# Altium PCB TK_EE06.PcbDoc
Units mm, origin at the board's own origin, x right, y up, seen from the top; angles counter-clockwise.
Board outline 76.4 x 52.91 mm, 6 copper layers (L1 (Top), L2 (GND), L3 (3.3V), L4 (5V Analog), L5 (GND), L6 (Bottom)), stack 1.231 mm thick; 53 components, 48 nets, 262 pads, 127 vias.
Unrouted connection lines stored in the file: 9.
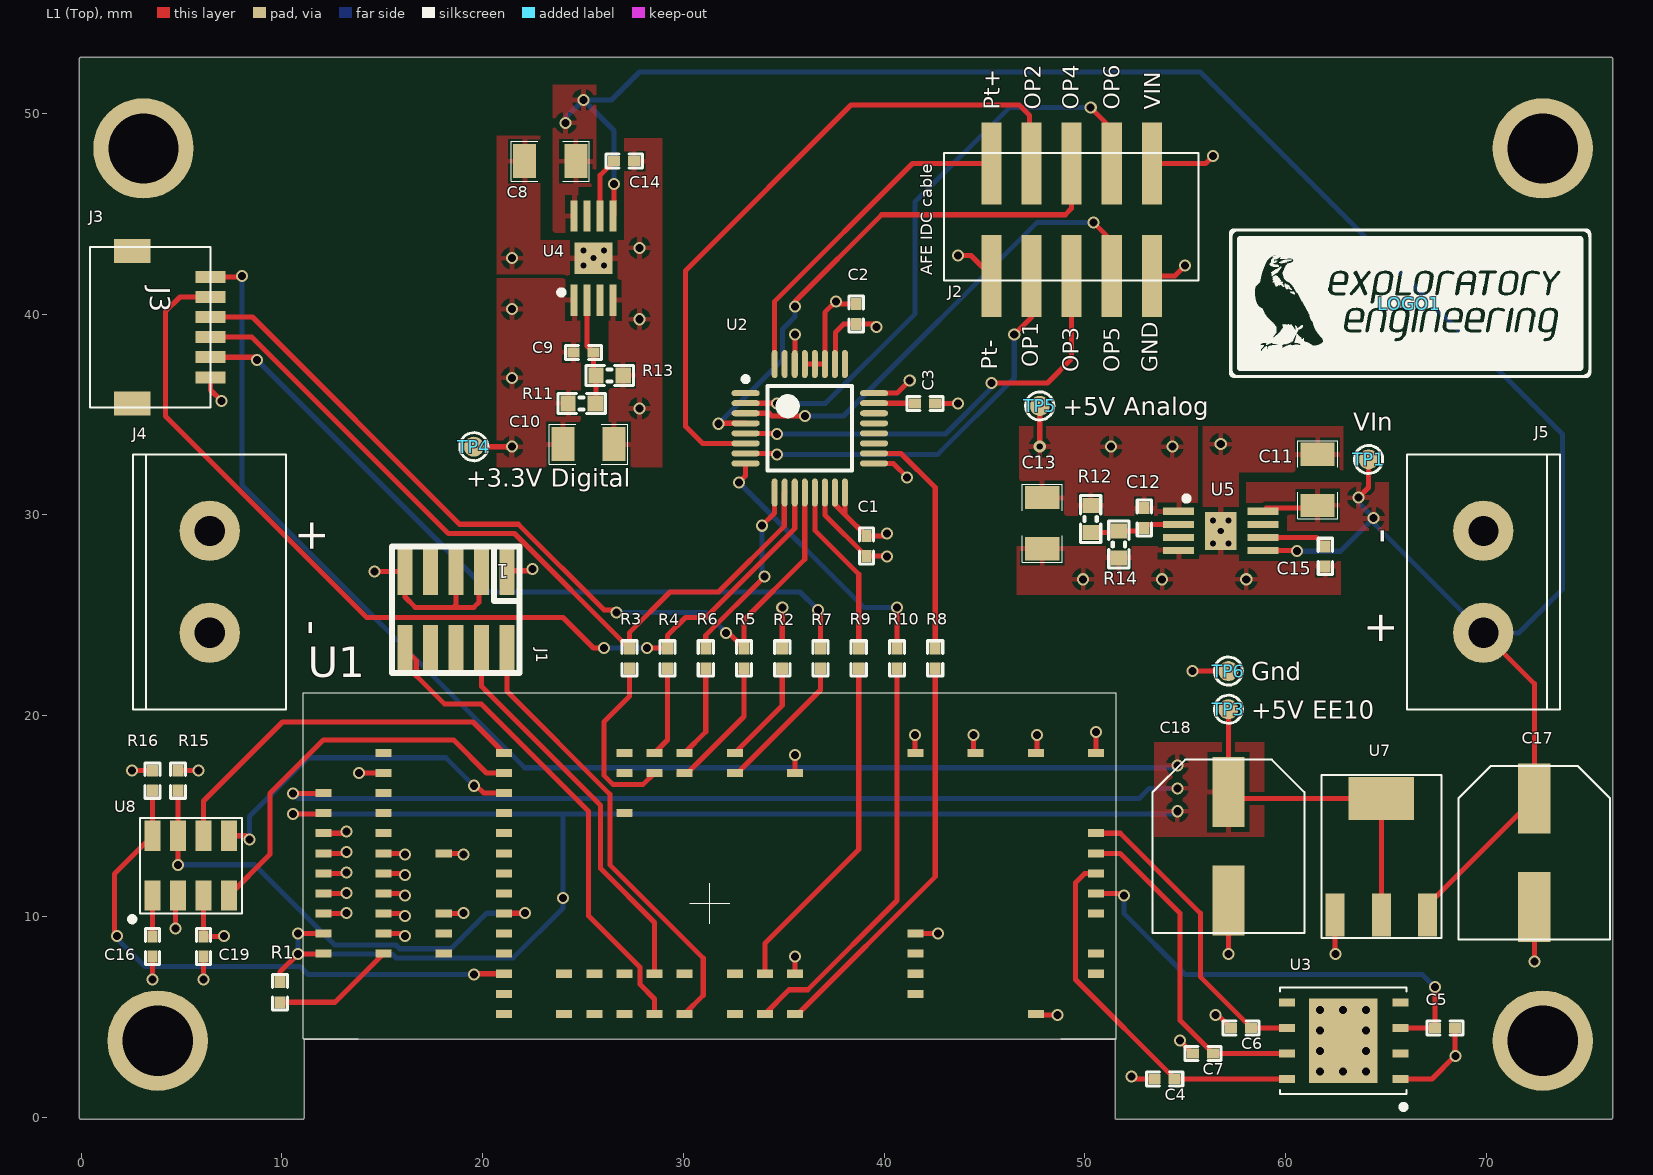
[diagram p0: L1 (Top) view]
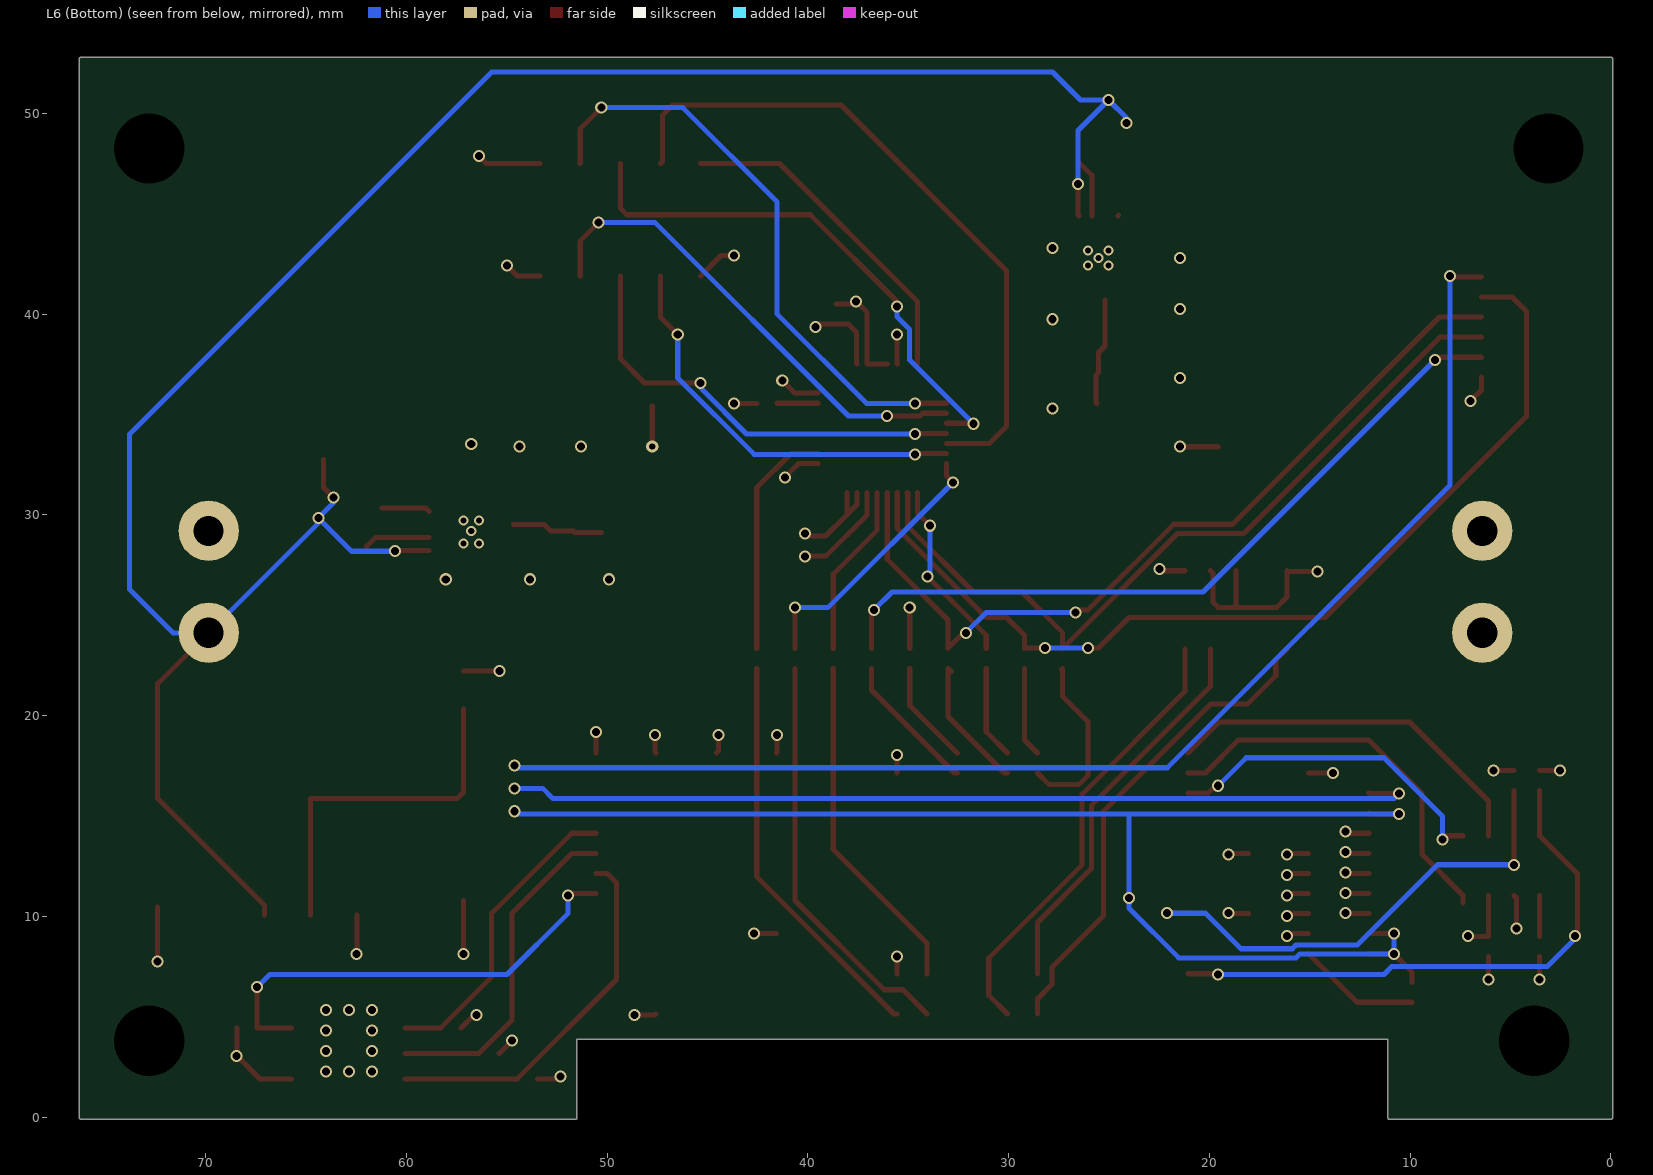
[diagram p1: L6 (Bottom) view, seen from below]
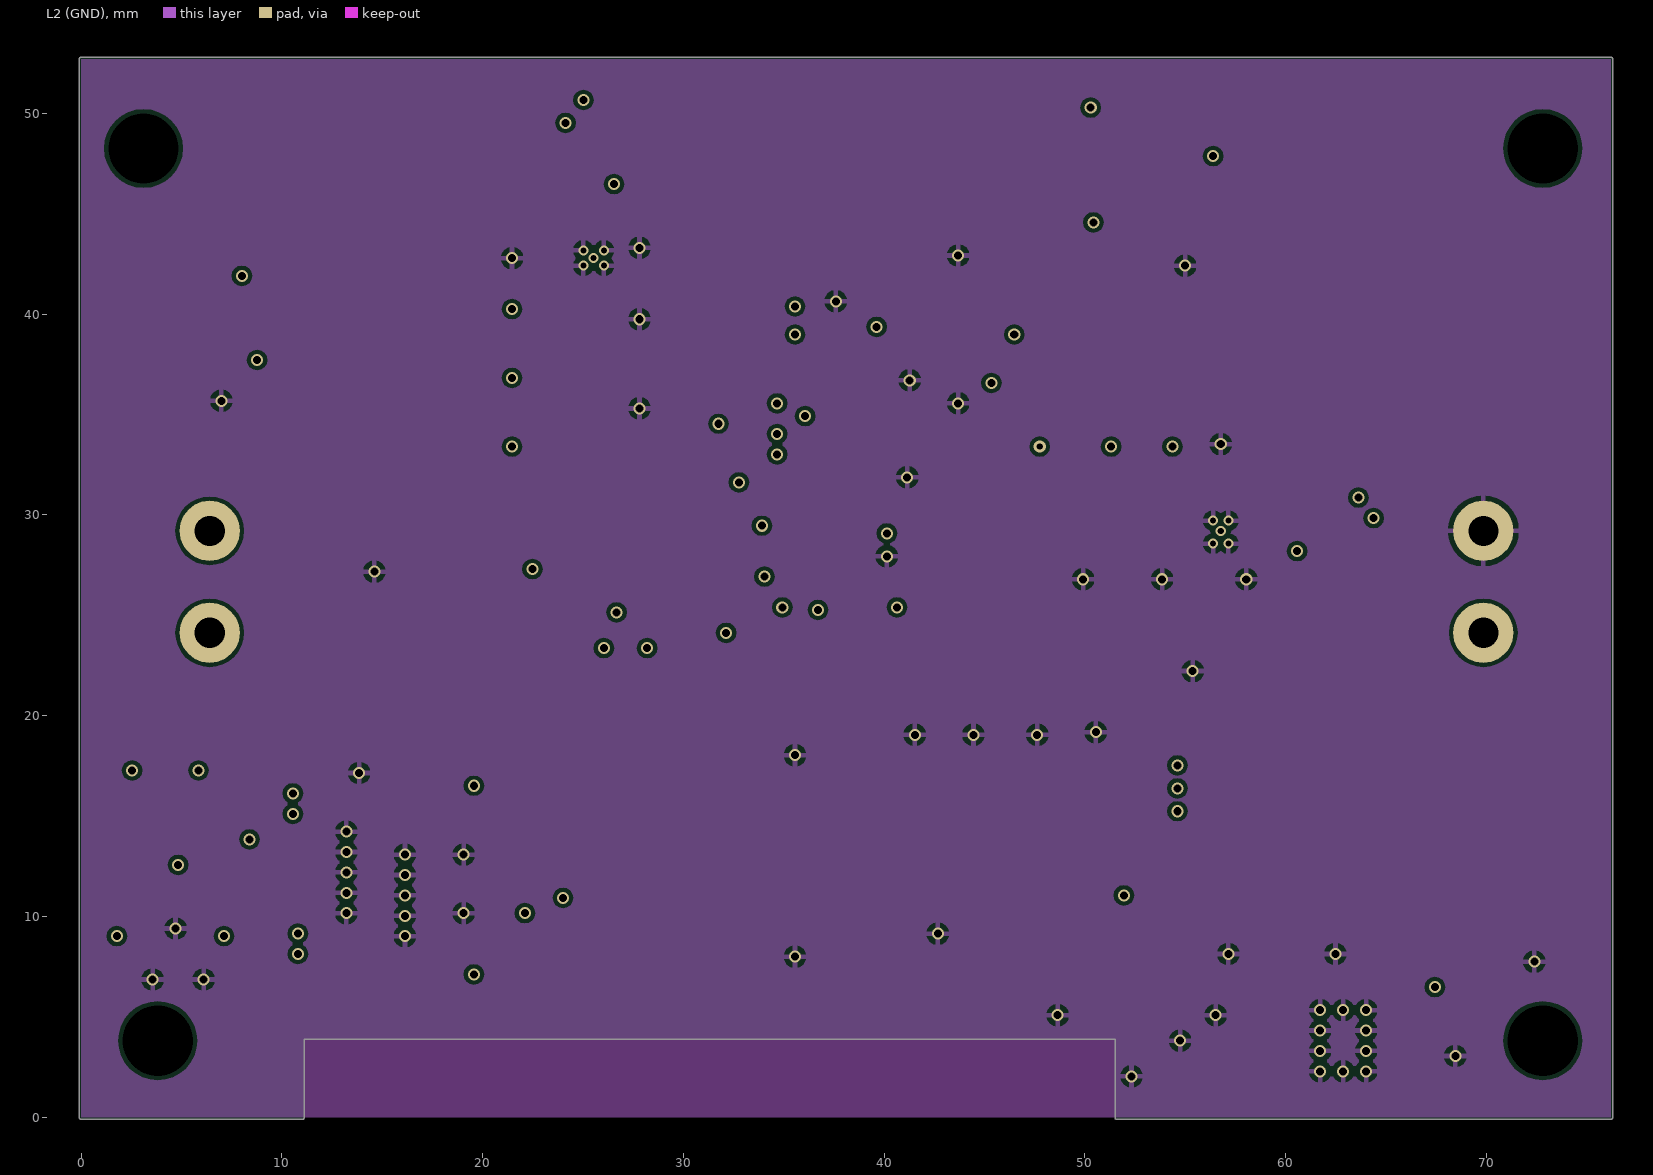
[diagram p2: L2 (GND)]
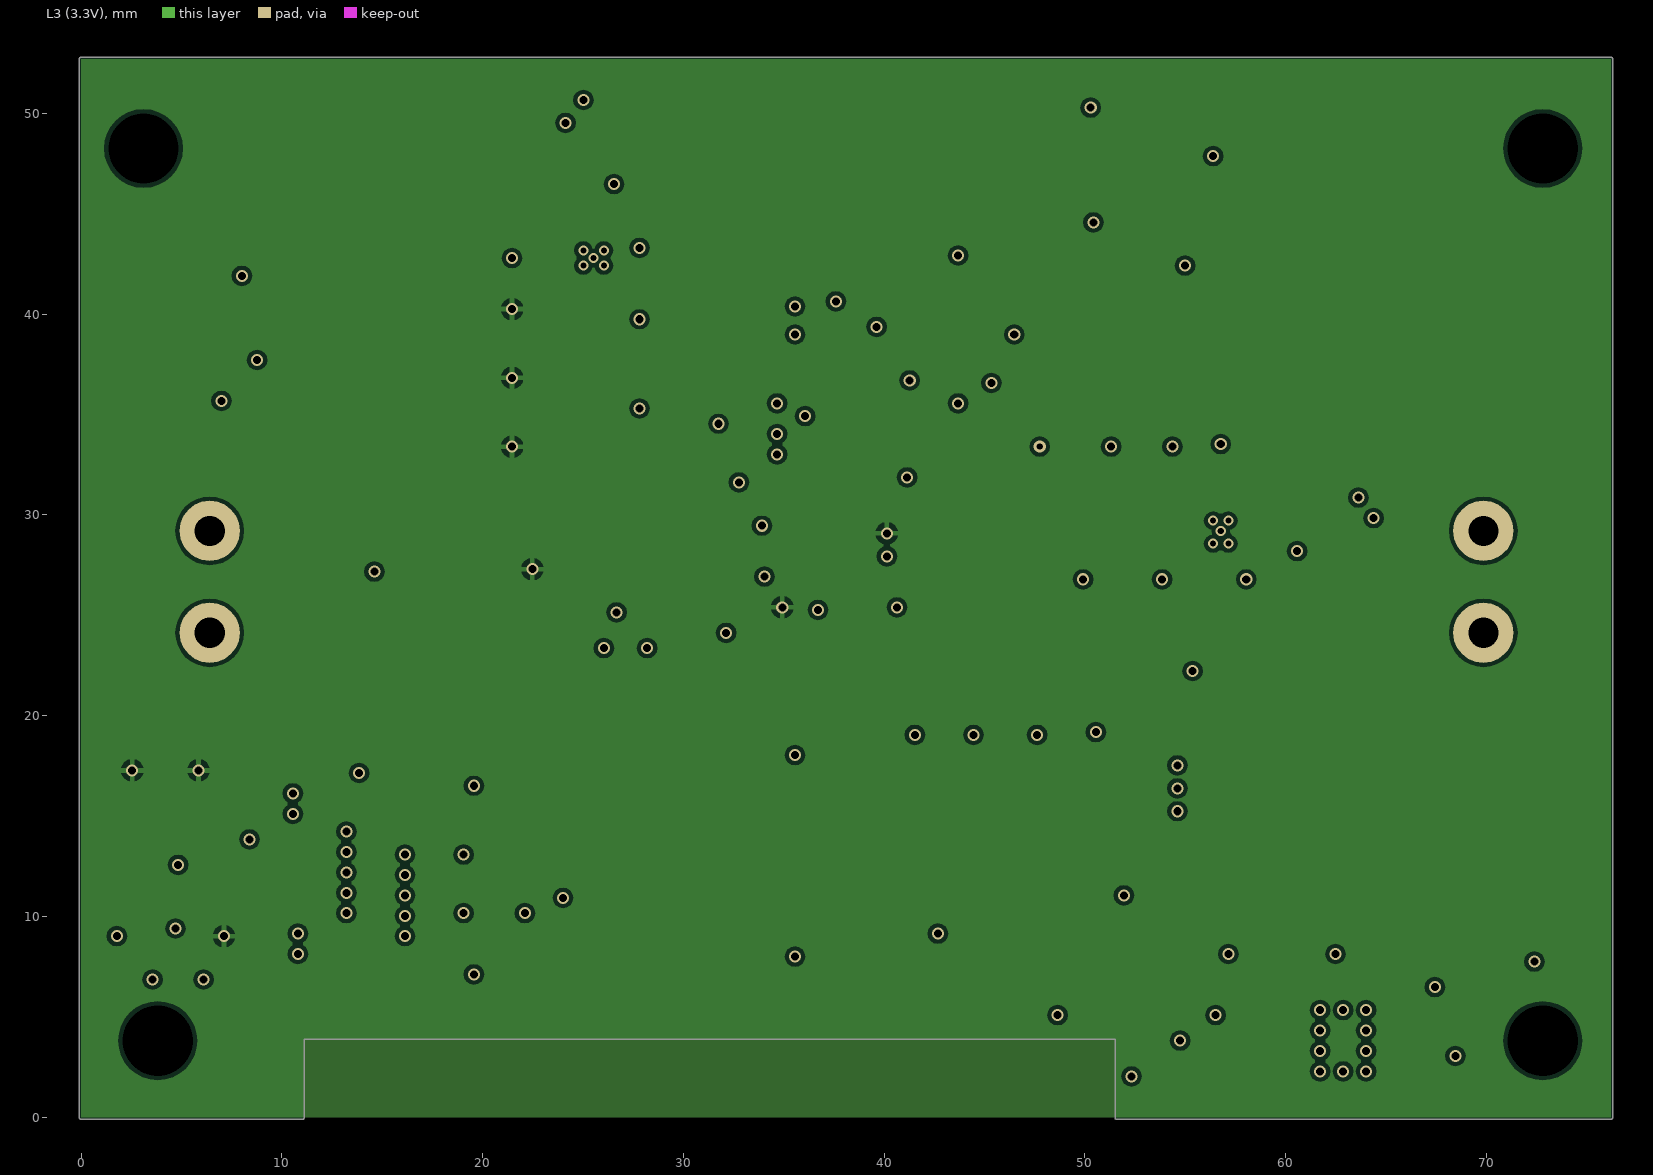
[diagram p3: L3 (3.3V)]
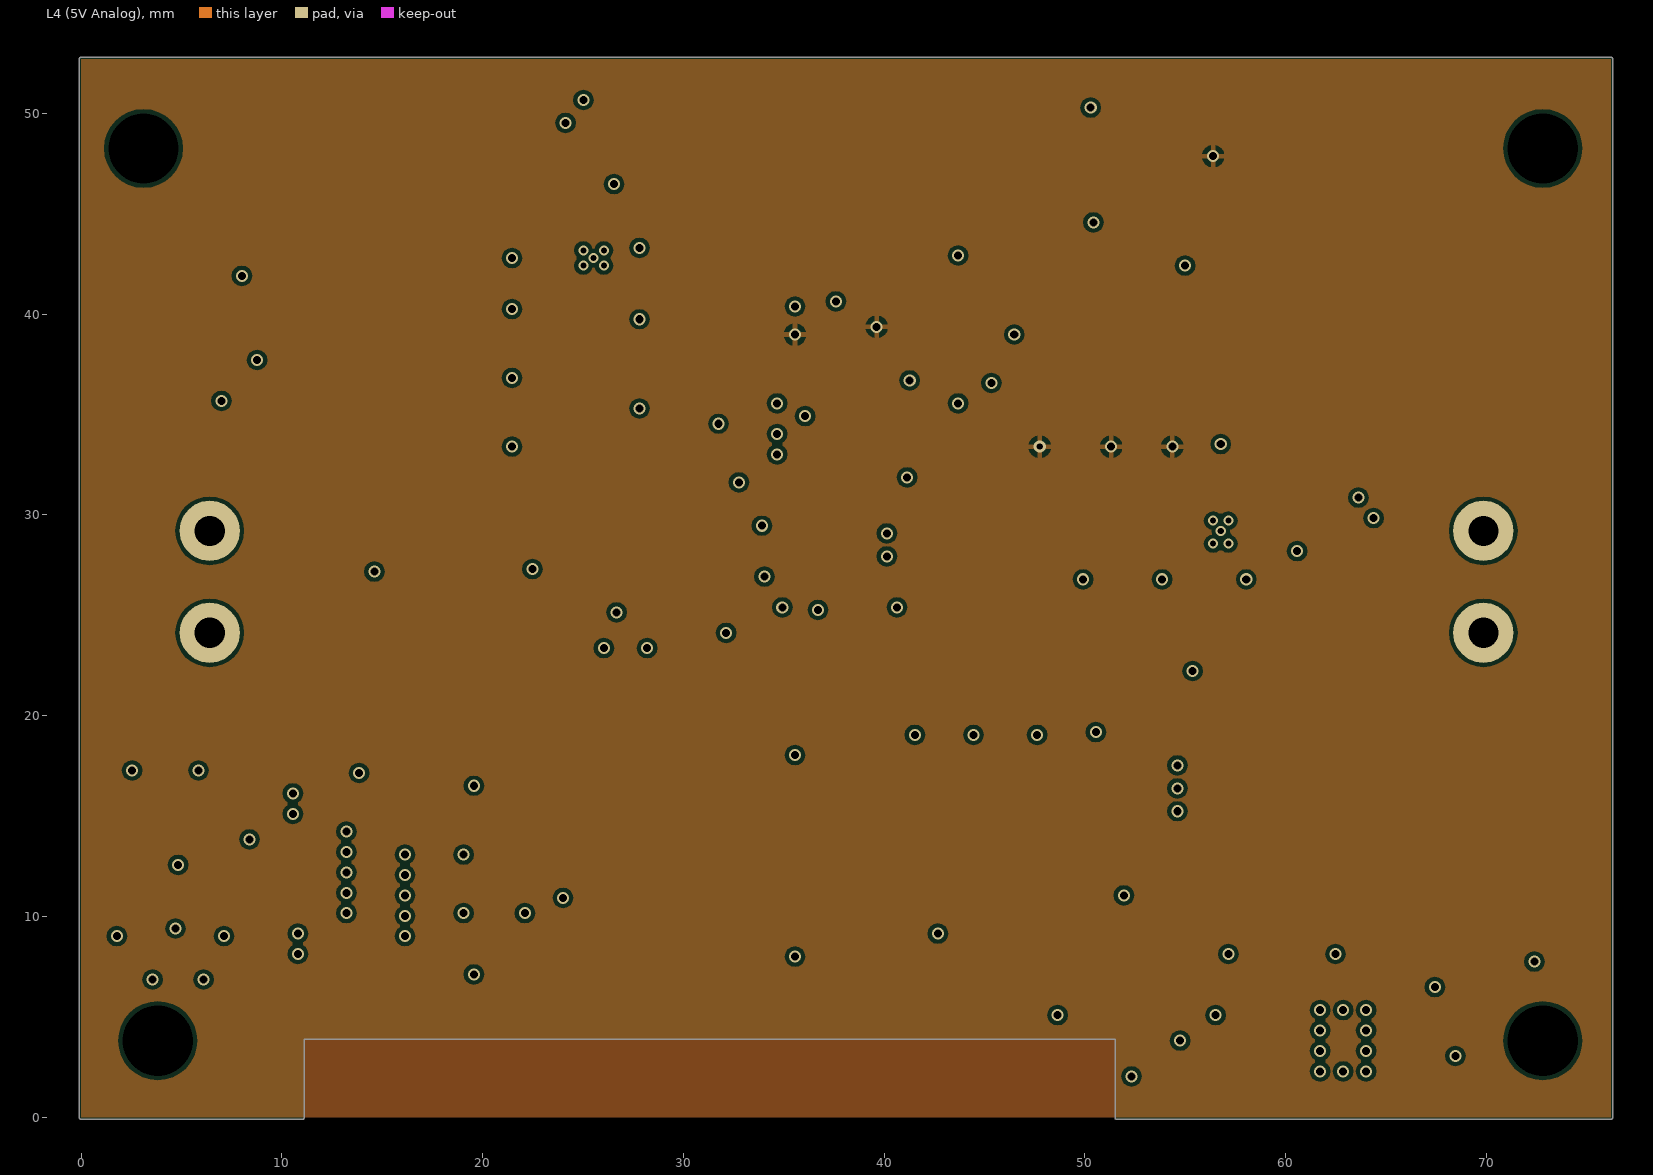
[diagram p4: L4 (5V Analog)]
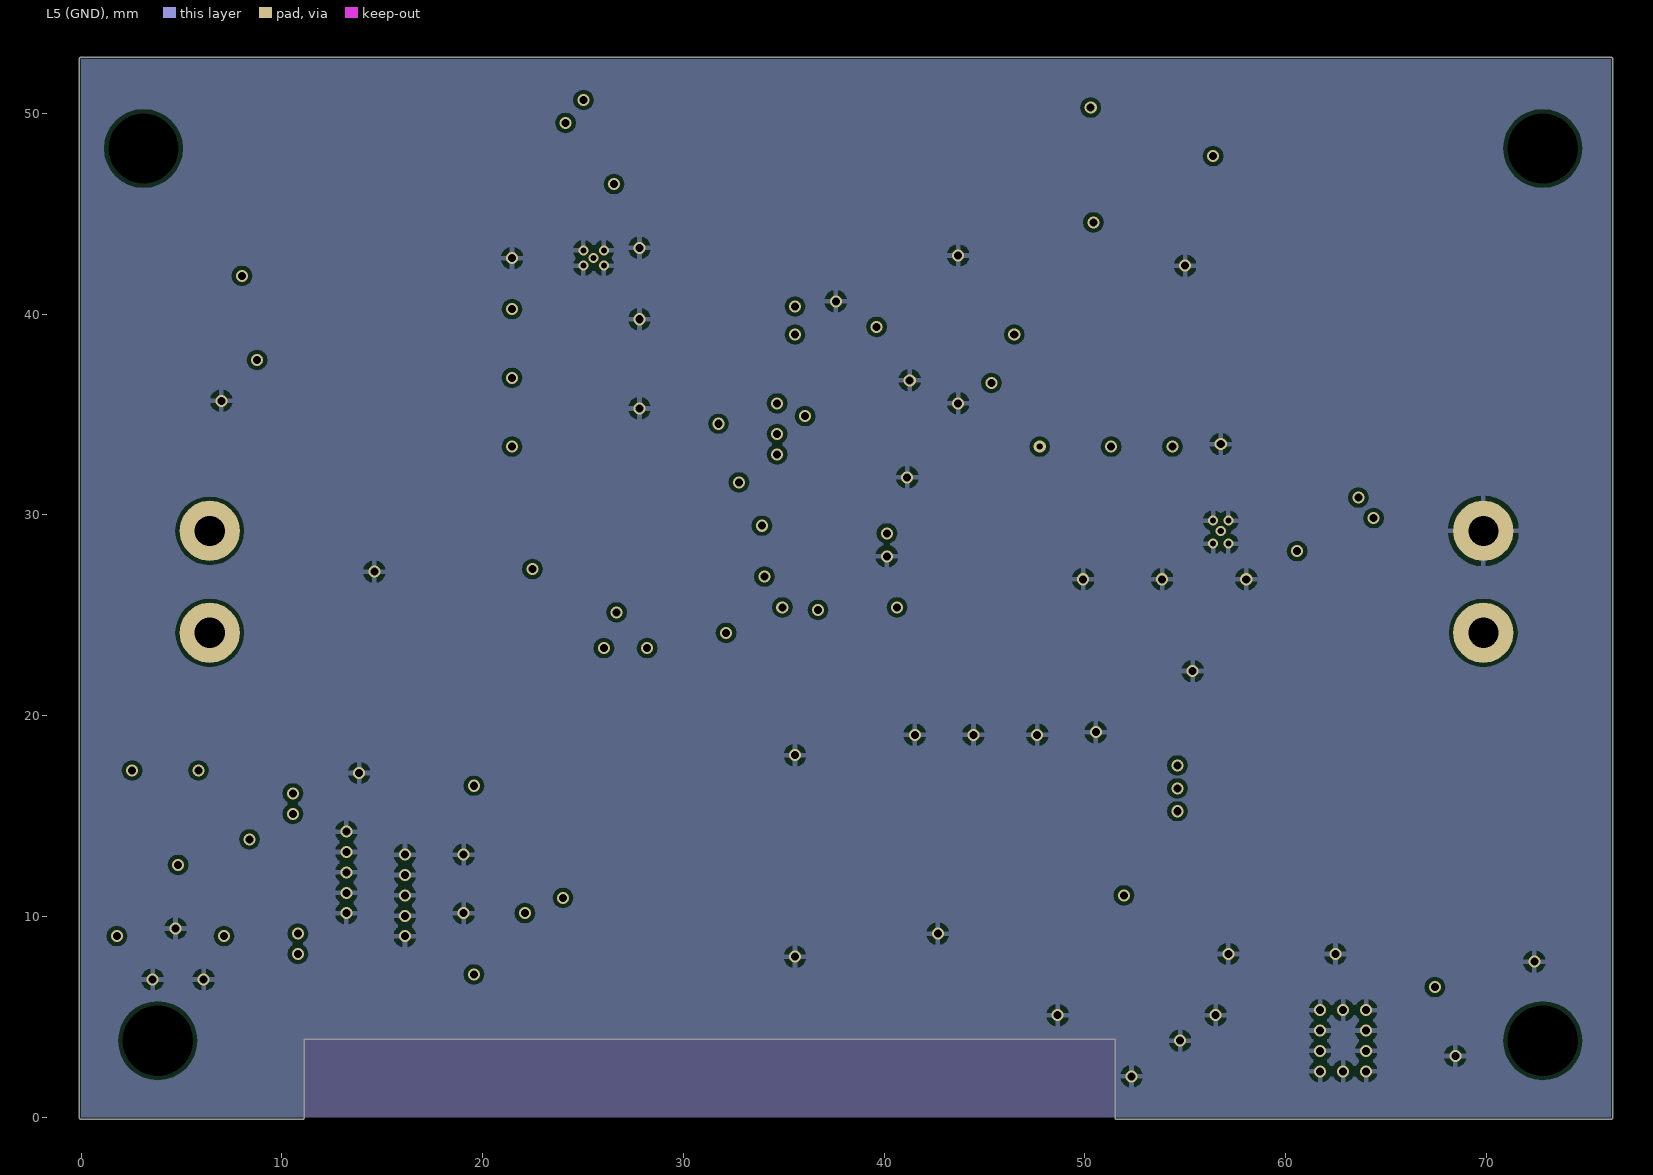
[diagram p5: L5 (GND)]
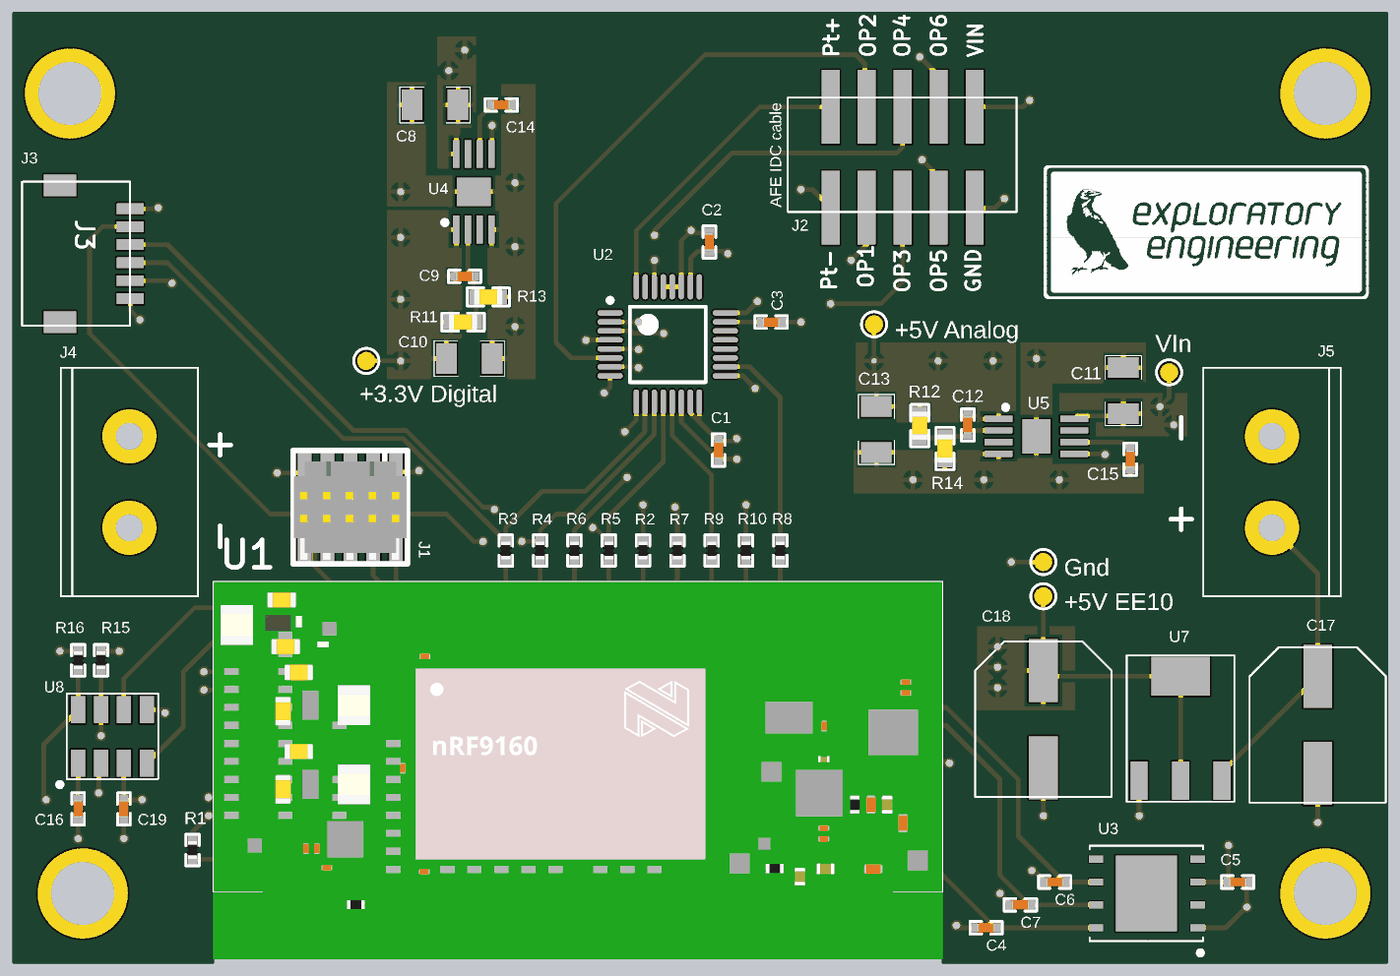
[diagram p6: 3D render of the assembled board from above, using the file's embedded part models]

## Layer stack, top to bottom
Top Solder: solder mask 0.0102, Solder Resist, Dk 3.5
L1 (Top): signal copper 0.0356
Dielectric 1: core 0.254, FR-4, Dk 4.2
L2 (GND): signal copper 0.036
Dielectric 3: prepreg 0.127, Dk 4.2
L3 (3.3V): signal copper 0.036
Dielectric 4: core 0.254, Dk 4.2
L4 (5V Analog): signal copper 0.036
Dielectric 5: prepreg 0.127, Dk 4.2
L5 (GND): signal copper 0.036
Dielectric 2: core 0.254, Dk 4.2
L6 (Bottom): signal copper 0.0356
Bottom Solder: solder mask 0.0102, Solder Resist, Dk 3.5

## Board outline
0,-0.1 cw(c0,0) -0.1,0 -0.1,52.705 cw(c0,52.705) 0,52.805 76.2,52.805 cw(c76.2,52.705) 76.3,52.705 76.3,0 cw(c76.2,0) 76.2,-0.1 51.562,-0.1 cw(c51.562,-0.05) 51.512,-0.05 51.512,3.887 11.099,3.887 11.099,-0.05 cw(c11.049,-0.05) 11.049,-0.1

## Design rules (kind name [scope] priority, off if disabled: settings)
Clearance [All] p1: gap=0.2 ignorepadtopadclearanceinfootprint=FALSE
HoleSize [All] p1: absolutevalues=TRUE maxlimit=4 minlimit=0.025 maxpercent=80.000 minpercent=20.000
MinimumSolderMaskSliver [All] p1: minsoldermaskwidth=0
PolygonConnect [All] p1: connectstyle=Relief reliefconductorwidth=0.254 reliefentries=4 polygonreliefangle="90 Angle" airgapwidth=0.254
RoutingVias [All] p1: holewidth=0.711 width=1.27 viastyle="Through Hole" minholewidth=0.711 minwidth=1.27 maxholewidth=0.711 maxwidth=1.27
SilkToSilkClearance [All] p1: silktosilkclearance=0.1
SilkToSolderMaskClearance [IsPad] p1: minsilkscreentomaskgap=0 clearancetoexposedcopper=TRUE
SolderMaskExpansion [All] p1: expansion=0.102
Width [All] p1: maxlimit=0.254 minlimit=0.254 preferedwidth=0.254
26 further rules are at their usual default settings.

## Classes and differential pairs
component class 3_Power: +3.3V_DIGITAL +5V +5V_ANALOG +12V C8 C9 C10 C11 C12 C13 C14 C15 C17 C18 D2 Gnd J4 J5 L1 R11 R12 R13 R14 TP1 TP3 TP4 TP5 TP6 U4 U5 U7 Vin
component class 2_EE-10_and_SIM_AFE_Interface: C1 C2 C3 C4 C5 C6 C7 C16 C19 J1 J2 J3 LOGO1 R1 R2 R3 R4 R5 R6 R7 R8 R9 R10 R15 R16 U1 U2 U3 U8

## Components (designator, comment, footprint, x,y, rotation, side; value= is the part's Value field where it differs from the comment)
C1 "100nF" CAPC1005X04L 39.116,28.448 r270 top
C2 "330nF" CAPC1005X04L 38.608,40.005 r90 top
C3 "1µF" CAPC1005X04L 42.037,35.56 r0 top
C4 "100nF" CAPC1005X04L 53.975,1.905 r0 top
C5 "47pF" CAPC1005X04L 67.945,4.445 r0 top
C6 "47pF" CAPC1005X04L 57.785,4.445 r180 top
C7 "47pF" CAPC1005X04L 55.88,3.175 r180 top
C8 "10uF" CAPC3216X18L 23.368,47.625 r0 top
C9 "10nF" CAPC1005X04L 25.019,38.1 r180 top
C10 "10uF" CAPC3216X18L 25.273,33.528 r0 top
C11 "10uF" CAPC3216X18L 61.595,31.75 r90 top
C12 "10nF" CAPC1005X04L 52.959,29.845 r90 top
C13 "10uF" CAPC3216X18L 47.879,29.591 r270 top
C14 "10nF" CAPC1005X04L 27.051,47.625 r180 top
C15 "10nF" CAPC1005X04L 61.976,27.94 r90 top
C16 "4.7uF" CAPC1005X04L 3.556,8.509 r90 top
C17 "100uF" INDUCTOR_UWX_100uF 72.39,15.875 r0 top
C18 "100uF" INDUCTOR_UWX_100uF 57.15,16.195 r0 top
C19 "4.7uF" CAPC1005X04L 6.096,8.509 r90 top
J1 "FTSH-105-01-F-DV-K-P" FTSH-105-K 18.669,25.273 r180 top
J2 "AFE3" AFE3_IDC_CABLE 55.67,41.68 r90 top
J3 "501568-0607" "CONN 6 PIN PICOCLASP" 6.44,41.86 r270 top
J4 "1755736" PHOENIX_CONTACT_MSTBVA_2_5 6.401,26.67 r270 top
J5 "1755736" PHOENIX_CONTACT_MSTBVA_2_5 69.85,26.67 r90 top
LOGO1 "EE LOGO" EE_LOGO 66.167,40.513 r0 top
R1 "10k" RESC1005X04L 9.906,6.223 r90 top
R2 "10k" RESC1005X04L 34.925,22.86 r90 top
R3 "47R" RESC1005X04L 27.305,22.86 r90 top
R4 "47R" RESC1005X04L 29.21,22.86 r90 top
R5 "47R" RESC1005X04L 33.02,22.86 r90 top
R6 "47R" RESC1005X04L 31.115,22.86 r90 top
R7 "47R" RESC1005X04L 36.83,22.86 r90 top
R8 "47R" RESC1005X04L 42.545,22.86 r90 top
R9 "47R" RESC1005X04L 38.735,22.86 r90 top
R10 "47R" RESC1005X04L 40.64,22.86 r90 top
R11 "178kR" RES1608x06L 28.182,35.56 r180 top
R12 "324kR" RES1608x06L 50.292,26.555 r90 top
R13 "100k" RES1608x06L 29.579,36.957 r180 top
R14 "100k" RES1608x06L 51.689,25.285 r90 top
R15 "10k" RESC1005X04L 4.826,16.764 r90 top
R16 "10k" RESC1005X04L 3.556,16.764 r90 top
TP1 "VIn" TESTPAD 64.135,32.766 r0 top
TP3 "+5V EE10" TESTPAD 57.15,20.32 r0 top
TP4 "+3.3V Digital" TESTPAD 19.558,33.401 r90 top
TP5 "+5V Analog" TESTPAD 47.752,35.433 r0 top
TP6 "Gnd" TESTPAD 57.15,22.225 r0 top
U1 "EE-10-v0.3" EE-10_V0.3 31.31,10.645 r0 top
U2 "ADS124S08" PQFP-G32 36.297,34.318 r0 top
U3 "SkySIM Argo 512 M2M SMD" QFN127P500X600X90_HS-9N 62.871,3.81 r90 top
U4 "TPS7A4901DGNR" R_PDSO_G8 24.552,44.899 r0 top
U5 "TPS7A4901DGNR" R_PDSO_G8 58.869,30.185 r270 top
U7 "LM1117MP-5/NOPB" SOT_223_LM1117 64.77,15.875 r0 top
U8 "CHIPCAP2" SENSOR_CHIPCAP2 3.556,11.049 r90 top

## Footprints (in the part's own frame and the unit in brackets; to place one, negate y for a bottom-side part, rotate by r counter-clockwise, add the part's x,y. Pads: shape width x height; smd on the part's side, far side on the other; paste and mask are expansions set on the pad)
AFE3_IDC_CABLE [mm]
  rect 4.1x1 smd: 1(5.83,10.33) 2(5.83,8.33) 3(5.83,6.33) 4(5.83,4.33) 5(5.83,2.33) 6(0.23,2.33) 7(0.23,4.33) 8(0.23,6.33) 9(0.23,8.33) 10(0.23,10.33)
  silkscreen extent 0,0 6.35,12.7
CAPC1005X04L [mm]
  rect 0.6x0.5 smd: 1(-0.5,0) 2(0.5,0)
  silkscreen extent -0.9,-0.35 0.9,0.35, body extent -0.51,-0.25 0.51,0.25, height 0.5
CAPC3216X18L [mm] "Chip Capacitor, 2-Leads, Body 3,20x1,60mm, IPC High Density"
  rect 1.15x1.7 smd: 1(-1.275,0) 2(1.275,0)
  silkscreen extent -1.95,-1 1.95,1, body extent -1.7,-0.9 1.7,0.9, height 1.8
"CONN 6 PIN PICOCLASP" [mm]
  rect 0.6x1.5 smd: 1(0,0) 2(1,0) 3(2,0) 4(3,0) 5(4,0) 6(5,0)
  rect 1.2x1.8 smd: 7(-1.3,-3.9) 7(6.3,-3.9)
  silkscreen extent -1.5,-6 6.5,0
EE-10_V0.3 [mm] "EE-10 v0.3 Footprint"
  rect 0.8x0.4 smd mask+0.05: 1(-19.25,5.5) 2(-19.25,4.5) 3(-19.25,3.5) 4(-19.25,2.5) 5(-19.25,1.5) 6(-19.25,0.5) 7(-19.25,-0.5) 8(-19.25,-1.5) 9(-19.25,-2.5) 10(-16.25,7.5) 11(-16.25,6.5) 12(-16.25,5.5) 13(-16.25,4.5) 14(-16.25,3.5) 15(-16.25,2.5) 16(-16.25,1.5) 17(-16.25,0.5) 18(-16.25,-0.5) 19(-16.25,-1.5) 20(-16.25,-2.5) 21(-13.25,2.5) 22(-13.25,-0.5) 23(-13.25,-1.5) 24(-13.25,-2.5) 25(-10.25,7.5) 26(-10.25,6.5) 27(-10.25,5.5) 28(-10.25,4.5) 29(-10.25,3.5) 30(-10.25,2.5) 31(-10.25,1.5) 32(-10.25,0.5) 33(-10.25,-0.5) 34(-10.25,-1.5) 35(-10.25,-2.5) 36(-10.25,-3.5) 37(-10.25,-4.5) 38(-10.25,-5.5) 39(-7.25,-3.5) 40(-7.25,-5.5) 41(-5.75,-3.5) 42(-5.75,-5.5) 43(-4.25,7.5) 44(-4.25,6.5) 45(-4.25,4.5) 46(-4.25,-3.5) 47(-4.25,-5.5) 48(-2.75,7.5) 49(-2.75,6.5) 50(-2.75,-3.5) 51(-2.75,-5.5) 52(-1.25,7.5) 53(-1.25,6.5) 54(-1.25,-3.5) 55(-1.25,-5.5) 56(1.25,7.5) 57(1.25,6.5) 58(1.25,-3.5) 59(1.25,-5.5) 60(2.75,-3.5) 61(2.75,-5.5) 62(4.25,6.5) 63(4.25,-3.5) 64(4.25,-5.5) 65(10.25,7.5) 66(10.25,-1.5) 67(10.25,-2.5) 68(10.25,-3.5) 69(10.25,-4.5) 70(13.25,7.5) 71(16.25,7.5) 72(16.25,-5.5) 73(19.25,7.5) 74(19.25,3.5) 75(19.25,2.5) 76(19.25,1.5) 77(19.25,0.5) 78(19.25,-0.5) 79(19.25,-2.5) 80(19.25,-3.5)
  silkscreen extent -20.25,-6.75 20.25,10.5, body extent -20.25,-10.5 20.25,10.5, height 1.2
EE_LOGO [mm] "Exploratory Engineering Logo"
  silkscreen extent -8.98,-3.65 9.05,3.74
FTSH-105-K [mm]
  rect 0.76x2.4 smd: 1(-2.54,-1.95) 2(-2.54,1.95) 3(-1.27,-1.95) 4(-1.27,1.95) 5(0,-1.95) 6(0,1.95) 7(1.27,-1.95) 8(1.27,1.95) 9(2.54,-1.95) 10(2.54,1.95)
  silkscreen extent -3.18,-3.15 3.18,3.15, body extent -3.14,-2.92 3.14,2.92, height 5.71
INDUCTOR_UWX_100uF [mm]
  rect 1.6x3.5 smd: +(0,0) -(0,-5.4)
  silkscreen extent -3.78,-7.02 3.78,1.62
PHOENIX_CONTACT_MSTBVA_2_5 [mm]
  round 3 hole 1.5: 1(-2.54,0) 2(2.54,0)
  silkscreen extent -6.35,-3.81 6.35,3.81
PQFP-G32 [mm]
  oval 1.4x0.3 smd: 1(-3.2,1.75) 2(-3.2,1.25) 3(-3.2,0.75) 4(-3.2,0.25) 5(-3.2,-0.25) 6(-3.2,-0.75) 7(-3.2,-1.25) 8(-3.2,-1.75) 17(3.2,-1.75) 18(3.2,-1.25) 19(3.2,-0.75) 20(3.2,-0.25) 21(3.2,0.25) 22(3.2,0.75) 23(3.2,1.25) 24(3.2,1.75)
  oval 0.3x1.4 smd: 9(-1.75,-3.2) 10(-1.25,-3.2) 11(-0.75,-3.2) 12(-0.25,-3.2) 13(0.25,-3.2) 14(0.75,-3.2) 15(1.25,-3.2) 16(1.75,-3.2) 25(1.75,3.2) 26(1.25,3.2) 27(0.75,3.2) 28(0.25,3.2) 29(-0.25,3.2) 30(-0.75,3.2) 31(-1.25,3.2) 32(-1.75,3.2)
  silkscreen extent -3.32,-2.1 2.1,2.57, body extent -2.5,-2.5 2.5,2.5, height 1.05
QFN127P500X600X90_HS-9N [mm] "QFN, 8-Leads, Body 5,00x6,00mm, Pitch 1,27mm, Thermal Pad 4,20x3,40mm, IPC Medium Density"
  rect 0.4x0.8 smd mask+0.05: 1(-1.905,-2.85) 2(-0.635,-2.85) 3(0.635,-2.85) 4(1.905,-2.85) 5(1.905,2.8) 6(0.635,2.8) 7(-0.635,2.8) 8(-1.905,2.8)
  rect 4.2x3.4 smd: 9(0,0)
  silkscreen extent -3.42,-3.15 2.65,3.15, body extent -2.5,-3 2.5,3, height 0.9
R_PDSO_G8 [mm]
  rect 0.35x1.55 smd: 1(0,-4.2) 2(0.65,-4.2) 3(1.3,-4.2) 4(1.95,-4.2) 5(1.95,0) 6(1.3,0) 7(0.65,0) 8(0,0)
  rect 1.89x1.57 smd: 9(0.975,-2.1)
  silkscreen extent -0.76,-3.94 -0.51,-3.68
RES1608x06L [mm]
  rect 0.75x0.8 smd: 1(2.575,0) 2(3.925,0)
  silkscreen extent 2.08,-0.5 4.43,0.5, body extent 2.45,-0.43 4.05,0.43, height 0.8
RESC1005X04L [mm]
  rect 0.6x0.55 smd: 1(-0.5,0) 2(0.5,0)
  silkscreen extent -0.87,-0.38 0.88,0.38, body extent -0.5,-0.25 0.5,0.25, height 0.3
SENSOR_CHIPCAP2 [mm]
  rect 1.5x0.8 smd: 1(0,0) 2(0,-1.27) 3(0,-2.54) 4(0,-3.81) 5(2.97,-3.81) 6(2.97,-2.54) 7(2.97,-1.27) 8(2.97,0)
  silkscreen extent -1.31,-4.44 3.86,1.14
SOT_223_LM1117 [mm]
  rect 0.95x2.15 smd: GND(-2.3,-5.8) VIN(2.3,-5.8) VOUT(0,-5.8)
  rect 3.25x2.15 smd: VOUT_TAB(0,0)
  silkscreen extent -2.99,-6.96 2.99,1.16
TESTPAD [mm]
  round 1 smd paste-5: 1(0,0)
  silkscreen extent -0.7,-0.7 0.7,0.7

## Part data
C1 C4: library part GRM155R71C104KA88D, "CAP CER 100nF 16V X7R 0402", Manufacturer="Murata Electronics North America", Operating Temperature="-55°C ~ 125°C", Package / Case="0402 (1005 Metric)", Ratings=-, Supplier Part Number 1=490-3261-6-ND, Temperature Coefficient=X7R, Tolerance=±10%, Voltage - Rated=16V, Applications="General Purpose", Capacitance=100nF, Category=Capacitors, ComponentLink1Description=http://www.murata.com/~/media/webrenewal/support/library/catalog/products/capacitor/mlcc/c02e.pdf, ComponentLink1URL=http://www.murata.com/~/media/webrenewal/support/library/catalog/products/capacitor/mlcc/c02e.pdf, Features=-, Height - Seated (Max)=-, Lead Spacing=-, Lead Style=-, Manufacturer Part Number=GRM155R71C104KA88D, Mounting Type="Surface Mount, MLCC", Packaging=Digi-Reel®, Pricing 1="1=0.16, 10=0.023, 50=0.0126, 100=0.0107, 250=0.00872, 500=0.00746, 1000=0.00581, 5000=0.00485 (EUR)", RoHS="RoHS Compliant", Size / Dimension="0.039\" L x 0.020\" W (1.00mm x 0.50mm)", Stock 1=24649903, Supplier 1=Digi-Key, Thickness (Max)="0.022\" (0.55mm)"
C2: library part CC0402KRX5R6BB334, "CAP CER 0.33UF 10V X5R 0402", Case/Package=0402, Case Code (Metric)=1005, Dielectric=X5R, Manufacturer=Yageo, Max Operating Temperature=85°C, Min Operating Temperature=-55°C, Package Quantity=10000, Tolerance=10%, Voltage Rating=10V, Capacitance=330nF, Case Code (Imperial)=0402, ComponentLink1Description=http://www.mouser.com/ds/2/447/Yageo_UPY-GP_NP0_16V-to-50V_9-358835.pdf?src-supplier=Mouser, ComponentLink1URL=http://www.mouser.com/ds/2/447/Yageo_UPY-GP_NP0_16V-to-50V_9-358835.pdf?src-supplier=Mouser, ComponentLink2Description=http://www.yageo.com/exep/pages/download/literatures/ProductSelectionGuide%202014_Final_2.pdf?src-supplier=Digi-Key, ComponentLink2URL=http://www.yageo.com/exep/pages/download/literatures/ProductSelectionGuide%202014_Final_2.pdf?src-supplier=Digi-Key, ComponentLink3Description=http://www.yageo.com/documents/recent/UPY-GPHC_X5R_4V-to-50V_25.pdf?src-supplier=Digi-Key, ComponentLink3URL=http://www.yageo.com/documents/recent/UPY-GPHC_X5R_4V-to-50V_25.pdf?src-supplier=Digi-Key, Composition=Ceramic, Halogen Free="Halogen Free", Lead Free="Lead Free", Length=0.039inch, Manufacturer Part Number=CC0402KRX5R6BB334, Mount="Surface Mount", Packaging="Tape and Reel", Pricing 1="1=0.11, 10=0.082, 100=0.0364, 500=0.02598, 1000=0.02041, 2500=0.01855, 5000=0.01707 (USD)", Stock 1=18753, Supplier 1=Digi-Key, Termination=SMD/SMT, Thickness=0.022inch, Voltage Rating (DC)=10V, Weight=2.3E-05oz, Width=0.02inch
C3: library part GRM155R70J105KA12D, "CAP CER 1UF 6.3V X7R 0402", Manufacturer="Murata Electronics North America", Operating Temperature="-55°C ~ 125°C", Package / Case="0402 (1005 Metric)", Ratings=-, Supplier Part Number 1=490-10024-6-ND, Temperature Coefficient=X7R, Tolerance=±10%, Voltage - Rated=6.3V, Applications="General Purpose", Capacitance=1µF, Category=Capacitors, ComponentLink1Description=http://www.murata.com/~/media/webrenewal/support/library/catalog/products/capacitor/mlcc/c02e.pdf, ComponentLink1URL=http://www.murata.com/~/media/webrenewal/support/library/catalog/products/capacitor/mlcc/c02e.pdf, Features="Derating Recommended", Height - Seated (Max)=-, Lead Spacing=-, Lead Style=-, Manufacturer Part Number=GRM155R70J105KA12D, Mounting Type="Surface Mount, MLCC", Packaging=Digi-Reel®, Part Status=Active, Pricing 1="1=0.1, 10=0.072, 50=0.039, 100=0.033, 250=0.027, 500=0.0231, 1000=0.018, 5000=0.015 (USD)", RoHS="RoHS Compliant", Size / Dimension="0.039\" L x 0.020\" W (1.00mm x 0.50mm)", Stock 1=3321, Supplier 1=Digi-Key, Thickness (Max)="0.022\" (0.55mm)"
C5 C6 C7: library part GRM1555C1H470FA01D, "Multilayer Ceramic Capacitors MLCC - SMD/SMT 0402 47pF 50volts C0G 1%"
C8 C10 C11 C13: library part CL31B106KAHNNNE, "CAP CER 10UF 25V X7R 1206", Case/Package=1206, Case Code (Metric)=3216, Dielectric=X7R, Manufacturer=Samsung, Max Operating Temperature=125°C, Min Operating Temperature=-55°C, Package Quantity=1, Supplier Part Number 1=1276-1804-1-ND, Tolerance=10%, Voltage=25V, Capacitance=10uF, Case Code (Imperial)=1206, ComponentLink1Description=https://datasheet.ciiva.com/26838/getdatasheetpartid-356415-26838914.pdf?src-supplier=Verical, ComponentLink1URL=https://datasheet.ciiva.com/26838/getdatasheetpartid-356415-26838914.pdf?src-supplier=Verical, ComponentLink2Description=https://datasheet.ciiva.com/25795/cl31b106kahnnne-25795260.pdf?src-supplier=Digi-Key, ComponentLink2URL=https://datasheet.ciiva.com/25795/cl31b106kahnnne-25795260.pdf?src-supplier=Digi-Key, ComponentLink3Description=https://datasheet.ciiva.com/16498/cl03a105mq3csnc-16498474.pdf?src-supplier=Future+Electronics, ComponentLink3URL=https://datasheet.ciiva.com/16498/cl03a105mq3csnc-16498474.pdf?src-supplier=Future+Electronics, Depth=1.6mm, Height=1.6mm, Length=3.2mm, Manufacturer Part Number=CL31B106KAHNNNE, Mount="Surface Mount", Packaging="Tape and Reel", Pricing 1="1 = 0,27000, 10 = 0,18700, 100 = 0,09470, 500 = 0,06476, 1000 = 0,05729 (USD)", Pricing 2="1 = 0,27000, 10 = 0,18700, 100 = 0,09470, 500 = 0,06476, 1000 = 0,05729 (USD)", Pricing 3="2000 = 0,04765, 4000 = 0,04332 (USD)", Pricing 4="2000 = 0,02720, 4000 = 0,02290, 10000 = 0,02250, 20000 = 0,02220, 50000 = 0,02180 (USD)", Radiation Hardening=No, RoHS=Yes, Stock 1=1878518, Stock 2=1878518, Stock 3=1874000, Stock 4=7124000, Supplier 1=Digi-Key, Supplier 2=Digi-Key, Supplier 3=Digi-Key, Supplier 4="Future Electronics", Supplier Part Number 2=1276-1804-6-ND, Supplier Part Number 3=1276-1804-2-ND, Supplier Part Number 4=CL31B106KAHNNNE-REEL, Thickness=0.071inch, Voltage Rating=25V, Width=0.063inch
C9 C12 C14 C15: library part CC0402KRX7R7BB103, "CAP CER 10nF 16V X7R 0402", Case/Package=0402, Case Code (Metric)=1005, Manufacturer=Yageo, Max Operating Temperature=155°C, Max Power Dissipation=100mW, Min Operating Temperature=-55°C, Operating Temperature="-55°C ~ 125°C", Package / Case="0402 (1005 Metric)", Package Quantity=10000, Ratings=-, Resistance=510kR, Supplier Part Number 1=311-1042-6-ND, Temperature Coefficient=X7R, Tolerance=±10%, Voltage - Rated=16V, Voltage Rating=50V, Applications="General Purpose", Capacitance=10nF, Case Code (Imperial)=0402, Category=Capacitors, ComponentLink1Description=http://www.yageo.com/documents/recent/UPY-GPHC_X7R_6.3V-to-50V_13.pdf, ComponentLink1URL=http://www.yageo.com/documents/recent/UPY-GPHC_X7R_6.3V-to-50V_13.pdf, ComponentLink2Description=https://datasheet.ciiva.com/11821/0900766b80f80784-11821325.pdf, ComponentLink2URL=https://datasheet.ciiva.com/11821/0900766b80f80784-11821325.pdf, ComponentLink3Description=https://datasheet.ciiva.com/7795/1678782-7795531.pdf, ComponentLink3URL=https://datasheet.ciiva.com/7795/1678782-7795531.pdf, ComponentLink4Description=https://datasheet.ciiva.com/16767/70260748-16767756.pdf, ComponentLink4URL=https://datasheet.ciiva.com/16767/70260748-16767756.pdf, ComponentLink5Description=https://datasheet.ciiva.com/43467/1678782-43467548.pdf, ComponentLink5URL=https://datasheet.ciiva.com/43467/1678782-43467548.pdf, ComponentLink6Description=https://datasheet.ciiva.com/16772/70260748-16772861.pdf, ComponentLink6URL=https://datasheet.ciiva.com/16772/70260748-16772861.pdf, ComponentLink7Description=https://datasheet.ciiva.com/30206/aoa0000ce2-30206926.pdf, ComponentLink7URL=https://datasheet.ciiva.com/30206/aoa0000ce2-30206926.pdf, ComponentLink8Description=https://datasheet.ciiva.com/9181/aoa0000ce2-9181455.pdf, ComponentLink8URL=https://datasheet.ciiva.com/9181/aoa0000ce2-9181455.pdf, ComponentLink9Description=https://datasheet.ciiva.com/16522/aoa0000ce2-16522239.pdf, ComponentLink9URL=https://datasheet.ciiva.com/16522/aoa0000ce2-16522239.pdf, Composition="Thick Film", Contact Plating=Tin, Depth=0.5mm, Features=-, Height=0.35mm, Height - Seated (Max)=-, Lead Free="Lead Free", Lead Spacing=-, Lead Style=-, Length=1mm, Manufacturer Part Number=CC0402KRX7R7BB103, Military Standard=Not, Mount="Surface Mount", Mounting Type="Surface Mount, MLCC", Number of Terminations=2, Packaging=Digi-Reel®, Power Rating=100mW, Pricing 1="1=0.1, 10=0.013, 25=0.0092, 100=0.0061, 250=0.00496, 500=0.00424, 1000=0.00331, 2500=0.00298, 5000=0.00276 (USD)", Pricing 2="1=0.1, 10=0.056, 100=0.0227, 1000=0.01021, 2500=0.00886, 5000=0.00732 (USD)", Radiation Hardening=No, REACH SVHC="No SVHC", RoHS="RoHS Compliant", Size / Dimension="0.039\" L x 0.020\" W (1.00mm x 0.50mm)", Stock 1=1340941, Stock 2=45002, Supplier 1=Digi-Key, Supplier 2=Digi-Key, Termination=SMD/SMT, Thickness (Max)="0.022\" (0.55mm)", Voltage Rating (DC)=50V, Width=0.02inch
C16 C19: library part GRM155R60J475ME47D, "CAP CER 4.7UF 6.3V X5R 0402", Case/Package=0402, Case Code (Metric)=1005, Dielectric=X5R, Manufacturer=Murata, Max Operating Temperature=85°C, Min Operating Temperature=-55°C, Package Quantity=10000, Tolerance=20%, Voltage=6.3V, Capacitance=4.7uF, Case Code (Imperial)=0402, ComponentLink1Description=https://www.murata.com/~/media/webrenewal/support/library/catalog/products/capacitor/mlcc/c02e.ashx?la=en-us&src-supplier=Digi-Key, ComponentLink1URL=https://www.murata.com/~/media/webrenewal/support/library/catalog/products/capacitor/mlcc/c02e.ashx?la=en-us&src-supplier=Digi-Key, ComponentLink2Description=http://www.farnell.com/datasheets/2047949.pdf?src-supplier=Element14, ComponentLink2URL=http://www.farnell.com/datasheets/2047949.pdf?src-supplier=Element14, Contact Plating=Tin, Depth=0.5mm, Height=0.5mm, Lead Free="Lead Free", Length=1mm, Manufacturer Part Number=GRM155R60J475ME47D, Mount="Surface Mount", Packaging="Tape and Reel", Pricing 1="1=0.15, 10=0.109, 100=0.051, 500=0.03578, 1000=0.02962, 2500=0.02756, 5000=0.02522 (USD)", REACH SVHC="No SVHC", Stock 1=28862984, Supplier 1=Digi-Key, Termination=SMD/SMT, Thickness=0.022inch, Voltage Rating=6.3V, Voltage Rating (DC)=6.3V, Weight=0.000212oz, Width=0.02inch
C17 C18: library part UWX1C101MCL1GB, "CAP ALUM 100UF 20% 16V SMD"
J1: "CONN HEADER 10POS DUAL .05\" SMD", Color=Black, Manufacturer="Samtec Inc.", Supplier Part Number 1=SAM8797-ND, Category="Connectors, Interconnects", ComponentLink1Description=http://suddendocs.samtec.com/prints/ftsh-1xx-xx-xxx-dv-xxx-mkt.pdf, ComponentLink1URL=http://suddendocs.samtec.com/prints/ftsh-1xx-xx-xxx-dv-xxx-mkt.pdf, Connector Type="Header, Shrouded", Contact Finish=Gold, Contact Finish Thickness="3µin (0.08µm)", Contact Mating Length="0.120\" (3.05mm)", Contact Type="Male Pin", Fastening Type=-, Features=-, Manufacturer Part Number=FTSH-105-01-F-DV-K-P, Mounting Type="Surface Mount", Number of Positions=10, Number of Positions Loaded=All, Number of Rows=2, Packaging=Tube, Pitch="0.050\" (1.27mm)", Pricing 1="1=3.48, 10=2.948, 50=2.546, 100=2.278, 250=2.01, 500=1.876, 1000=1.742, 2500=1.675, 5000=1.6415 (USD)", RoHS="RoHS Compliant", Row Spacing="0.050\" (1.27mm)", Stock 1=160, Supplier 1=Digi-Key, Termination=Solder
J3: "CONN HEADER SMD R/A 6POS 1MM", Color=Natural, Current Rating=1A, Manufacturer=Molex, Max Operating Temperature=85°C, Max Voltage Rating (AC)=50V, Max Voltage Rating (DC)=5.05kV, Min Operating Temperature=-40°C, Package Quantity=1, ComponentLink1Description=https://www.molex.com/pdm_docs/ps/PS-501568-001.pdf?src-supplier=Digi-Key, ComponentLink1URL=https://www.molex.com/pdm_docs/ps/PS-501568-001.pdf?src-supplier=Digi-Key, ComponentLink2Description=http://www.mouser.com/ds/2/276/5015680607_PCB_HEADERS-155422.pdf?src-supplier=Mouser, ComponentLink2URL=http://www.mouser.com/ds/2/276/5015680607_PCB_HEADERS-155422.pdf?src-supplier=Mouser, ComponentLink3Description=http://www.molex.com/webdocs/datasheets/pdf/en-us/5015680607_PCB_HEADERS.pdf?src-supplier=Avnet, ComponentLink3URL=http://www.molex.com/webdocs/datasheets/pdf/en-us/5015680607_PCB_HEADERS.pdf?src-supplier=Avnet, ComponentLink4Description=http://uk.rs-online.com/webdocs/13c5/0900766b813c54a2.pdf?src-supplier=RSComponents, ComponentLink4URL=http://uk.rs-online.com/webdocs/13c5/0900766b813c54a2.pdf?src-supplier=RSComponents, ComponentLink5Description=http://www.farnell.com/datasheets/1912348.pdf?src-supplier=Element14, ComponentLink5URL=http://www.farnell.com/datasheets/1912348.pdf?src-supplier=Element14, ComponentLink6Description=http://www.molex.com/webdocs/datasheets/pdf/en-us/5015680607_PCB_HEADERS.pdf?src-supplier=Avnet+Europe, ComponentLink6URL=http://www.molex.com/webdocs/datasheets/pdf/en-us/5015680607_PCB_HEADERS.pdf?src-supplier=Avnet+Europe, Connector Type="Male Pin", Contact Material=Bronze,Brass, Contact Plating=Tin, Depth=5.35mm, Fastening Type=Detent, Gender=Male, Glow Wire Compliant=Non-compliant, Housing Color=Natural, Housing Material=Thermoplastic, Lead Free="Lead Free", Length=8mm, Manufacturer Part Number=501568-0607, Mount="Surface Mount", Number of Circuits=6, Number of Contacts=6, Number of Positions=6, Number of Rows=1, Orientation="Right Angle", Packaging="Tape and Reel", Pitch=1mm, Pricing 1="1=0.77, 10=0.675, 100=0.5825, 500=0.47658 (USD)", Radiation Hardening=No, REACH SVHC=Unknown, Stock 1=39745, Supplier 1=Digi-Key, Termination=Solder, Voltage Rating=50V, Voltage Rating (AC)=50V, Voltage Rating (DC)=50V
J4 J5: "TERM BLOCK HDR 2POS VERT 5.08MM"
LOGO1: library part EE-LOGO, "Exploratory Engineering Logo Silkscreen"
R1 R2 R15 R16: library part RC0402FR-0710KL, "RES SMD 10K OHM 1% 1/16W 0402", Manufacturer=Yageo, Operating Temperature="-55°C ~ 155°C", Package / Case="0402 (1005 Metric)", Power (Watts)="0.063W, 1/16W", Supplier Device Package=0402, Supplier Part Number 1=311-10.0KLRDKR-ND, Temperature Coefficient=±100ppm/°C, Tolerance=±1%, Category=Resistors, ComponentLink1Description=http://www.yageo.com/NewPortal/yageodocoutput?fileName=/pdf/R-Chip/PYu-RC_Group_51_RoHS_L_3.pdf, ComponentLink1URL=http://www.yageo.com/NewPortal/yageodocoutput?fileName=/pdf/R-Chip/PYu-RC_Group_51_RoHS_L_3.pdf, Composition="Thick Film", Features="Moisture Resistant", Height="0.016\" (0.40mm)", Manufacturer Part Number=RC0402FR-0710KL, Number of Terminations=2, Packaging=Digi-Reel®, Pricing 1="1=0.1, 10=0.013, 25=0.0096, 100=0.0054, 250=0.00412, 500=0.00328, 1000=0.00242, 2500=0.0021, 5000=0.00173 (USD)", Resistance (Ohms)=10k, RoHS="RoHS Compliant", Size / Dimension="0.039\" L x 0.020\" W (1.00mm x 0.50mm)", Stock 1=3763255, Supplier 1=Digi-Key
R3 R4 R5 R6 R7 R8 R9 R10: library part RC0402JR-0747RL, "RES SMD 47 OHM 5% 1/16W 0402", Case/Package=0402, Case Code (Metric)=1005, Manufacturer=Yageo, Max Operating Temperature=155°C, Min Operating Temperature=-55°C, Power Rating=62.5mW, Temperature Coefficient=100ppm/°C, Tolerance=5%, Voltage Rating=50V, Case Code (Imperial)=0402, ComponentLink1Description=http://www.mouser.com/ds/2/447/PYu-RC0402_51_RoHS_L_6_r-8721.pdf?src-supplier=Mouser, ComponentLink1URL=http://www.mouser.com/ds/2/447/PYu-RC0402_51_RoHS_L_6_r-8721.pdf?src-supplier=Mouser, ComponentLink2Description=http://www.farnell.com/datasheets/1018594.pdf?src-supplier=Element14, ComponentLink2URL=http://www.farnell.com/datasheets/1018594.pdf?src-supplier=Element14, Composition="Thick Film", Depth=0.5mm, Height=0.35mm, Lead Free="Lead Free", Length=1mm, Manufacturer Part Number=RC0402JR-0747RL, Military Standard=Not, Packaging="Tape and Reel", Pricing 1="1=0.1, 10=0.013, 100=0.0053, 1000=0.00236, 2500=0.00205, 5000=0.00169 (USD)", REACH SVHC=Unknown, Resistance=47R, Stock 1=2780035, Supplier 1=Digi-Key, Termination=SMD/SMT, Weight=2.3E-05oz, Width=0.5mm
R11: library part RT0603BRD07178KL, "RES SMD 178K OHM 0.1% 1/10W 0603"
R12: library part RT0603BRD07324KL, "RES SMD 324K OHM 0.1% 1/10W 0603", Case/Package=0402, Case Code (Metric)=1005, Manufacturer=Yageo, Manufacturer Part Number=RT0402BRD07100KL, Max Operating Temperature=125°C, Max Power Dissipation=63mW, Min Operating Temperature=-55°C, Package Quantity=5000, Power Rating=62.5mW, Temperature Coefficient=25ppm/°C, Tolerance=0.1%, Voltage Rating=50V, Working Voltage=75V, Case Code (Imperial)=0402, ComponentLink1Description=http://www.mouser.com/ds/2/447/yageodocoutput-1125656.pdf?src-supplier=Mouser, ComponentLink1URL=http://www.mouser.com/ds/2/447/yageodocoutput-1125656.pdf?src-supplier=Mouser, ComponentLink2Description=http://documents.rs-components.com/techlib://itc_doclist_GB.htm?stockno=6174810&src-supplier=RSComponents, ComponentLink2URL=http://documents.rs-components.com/techlib://itc_doclist_GB.htm?stockno=6174810&src-supplier=RSComponents, Composition="Thin Film", Depth=0.5mm, Features="Moisture Resistant", Height=0.014inch, Lead Free="Lead Free", Length=0.039inch, Military Standard=Not, Mount="Surface Mount", Number of Terminations=2, Packaging="Tape and Reel", Pricing 1="1=0.38, 10=0.29, 100=0.1218, 1000=0.0672, 2500=0.063, 5000=0.058 (USD)", Pricing 2="1=0.38, 10=0.32, 100=0.125, 1000=0.05233, 2500=0.04797 (USD)", Resistance=324kR, Stock 1=211221, Stock 2=251452, Supplier 1=Digi-Key, Supplier 2=Digi-Key, Termination=SMD/SMT, Voltage Rating (DC)=50V, Width=0.02inch
R13 R14: library part RT0603BRD07100KL, "Yageo TF213 Series Thick Film Surface Mount Resistor 0603 Case 100k 0.1% 0.1W 25ppm/C", Case/Package=0603, Case Code (Metric)=1608, Manufacturer=Yageo, Manufacturer Part Number=RT0603BRD07178KL, Max Operating Temperature=125°C, Max Power Dissipation=100mW, Min Operating Temperature=-55°C, Package Quantity=5000, Resistance=178kR, Temperature Coefficient=25ppm/°C, Tolerance=0.1%, Voltage Rating=75V, Voltage Rating (DC)=50V, Case Code (Imperial)=0603, ComponentLink1Description=http://www.mouser.com/ds/2/447/yageodocoutput-1125656.pdf?src-supplier=Mouser, ComponentLink1URL=http://www.mouser.com/ds/2/447/yageodocoutput-1125656.pdf?src-supplier=Mouser, ComponentLink2Description=http://www.yageo.com/NewPortal/yageodocoutput?fileName=/pdf/R-Chip/PYu-RT_1-to-0.05_RoHS_L_5.pdf&src-supplier=Digi-Key, ComponentLink2URL=http://www.yageo.com/NewPortal/yageodocoutput?fileName=/pdf/R-Chip/PYu-RT_1-to-0.05_RoHS_L_5.pdf&src-supplier=Digi-Key, ComponentLink3Description=http://www.yageo.com/documents/recent/PYu-RT_1-to-0.05_RoHS_L_6.pdf?src-supplier=Avnet, ComponentLink3URL=http://www.yageo.com/documents/recent/PYu-RT_1-to-0.05_RoHS_L_6.pdf?src-supplier=Avnet, Composition="Thin Film", Contact Plating=Tin,Matte, Height=0.022inch, Lead Free="Lead Free", Length=0.063inch, Number of Terminations=2, Packaging="Tape and Reel", Power Rating=100mW, Pricing 1="1=0.38, 10=0.32, 100=0.125, 1000=0.05233, 2500=0.04797 (USD)", Radiation Hardening=No, Stock 1=9922, Supplier 1=Digi-Key, Termination=SMD/SMT, Width=0.031inch
TP1 TP3 TP4 TP5 TP6: library part TESTPAD
U1: "EE-10 v0.3 PCB Module", Manufacturer=Telenor, Manufacturer Part Number=EE-10-v0.3
U2: library part ADS124S08IPBS, "IC ADC 24BIT 8CH I2C 32-TQFP", Case/Package=LQFP, Manufacturer="Texas Instruments", Max Operating Temperature=125°C, Min Operating Temperature=-50°C, ComponentLink1Description=http://www.ti.com/lit/ds/symlink/ads124s06.pdf?src-supplier=Digi-Key, ComponentLink1URL=http://www.ti.com/lit/ds/symlink/ads124s06.pdf?src-supplier=Digi-Key, Interface=SPI, Manufacturer Part Number=ADS124S08IPBS, Mount="Surface Mount", Number of A/D Converters=1, Number of Bits=24, Number of Inputs=12, Packaging=Tray, Pricing 1="1=10.47, 10=9.46, 25=9.02, 100=7.832, 500=6.82, 1000=5.94 (USD)", Sampling Rate=4000S/s, Stock 1=1055, Supplier 1=Digi-Key
U3: library part SKYSIM-ARGO-LTE-MFF2, "SkySIM® Argo 512 M2M SMD - LTE"
U4 U5: "IC REG LIN POS ADJ 150MA 8MSOP"
U7: "Space saving 800-mA low-dropout linear regulator with internal current limit 4-SOT-223 0 to 125", Case/Package=SOT-223, Current Rating=800mA, Dropout Voltage=1.2V, Manufacturer="TI National Semiconductor", Max Input Voltage=15V, Max Operating Temperature=125°C, Max Output Voltage=33V, Max Power Dissipation=1.83W, Min Input Voltage=3V, Min Operating Temperature=0°C, Nominal Output Voltage=3.3V, Output Voltage Accuracy=1%, Package Quantity=1000, Quiescent Current=10mA, Reference Voltage=1.212V, Accuracy=1%, ComponentLink1Description=https://www.verical.com/server-webapp/html/getDatasheet?partID=112131&src-supplier=Verical, ComponentLink1URL=https://www.verical.com/server-webapp/html/getDatasheet?partID=112131&src-supplier=Verical, ComponentLink2Description=http://www.ti.com/lit/ds/symlink/lm1117-n.pdf?src-supplier=Avnet+Asia, ComponentLink2URL=http://www.ti.com/lit/ds/symlink/lm1117-n.pdf?src-supplier=Avnet+Asia, ComponentLink3Description=http://www.ti.com/lit/ds/symlink/lm1117.pdf?src-supplier=Digi-Key, ComponentLink3URL=http://www.ti.com/lit/ds/symlink/lm1117.pdf?src-supplier=Digi-Key, ComponentLink4Description=http://www.ti.com/lit/ds/symlink/lm1117-n.pdf?src-supplier=Avnet+Europe, ComponentLink4URL=http://www.ti.com/lit/ds/symlink/lm1117-n.pdf?src-supplier=Avnet+Europe, ComponentLink5Description=https://www.distrelec.com/ishop/Datasheets/lm1117_eng_tds.pdf?src-supplier=Distrelec, ComponentLink5URL=https://www.distrelec.com/ishop/Datasheets/lm1117_eng_tds.pdf?src-supplier=Distrelec, ComponentLink6Description=http://www.mouser.com/ds/2/405/sbvs121c-520966.pdf?src-supplier=Mouser, ComponentLink6URL=http://www.mouser.com/ds/2/405/sbvs121c-520966.pdf?src-supplier=Mouser, ComponentLink7Description=http://www.ti.com/general/docs/lit/getliterature.tsp?genericPartNumber=TPS7A49&amp;&amp;fileType=pdf&src-supplier=Newark, ComponentLink7URL=http://www.ti.com/general/docs/lit/getliterature.tsp?genericPartNumber=TPS7A49&amp;&amp;fileType=pdf&src-supplier=Newark, ComponentLink8Description=http://www.ti.com/lit/ds/sbvs121b/sbvs121b.pdf?src-supplier=Avnet+Asia, ComponentLink8URL=http://www.ti.com/lit/ds/sbvs121b/sbvs121b.pdf?src-supplier=Avnet+Asia, ComponentLink9Description=http://www.ti.com/lit/ds/sbvs121b/sbvs121b.pdf?src-supplier=Avnet+Europe, ComponentLink9URL=http://www.ti.com/lit/ds/sbvs121b/sbvs121b.pdf?src-supplier=Avnet+Europe, ComponentLink10Description=http://www.ti.com/general/docs/lit/getliterature.tsp?genericPartNumber=TPS7A49&&fileType=pdf&src-supplier=Avnet, ComponentLink10URL=http://www.ti.com/general/docs/lit/getliterature.tsp?genericPartNumber=TPS7A49&&fileType=pdf&src-supplier=Avnet, ComponentLink11Description=http://www.produktinfo.conrad.com/datenblaetter/1000000-1099999/001015155-da-01-en-IC_REG_LDO_ADJ_TPS7A4901DGNR_VSSOP_8_TID.pdf?src-supplier=Conrad, ComponentLink11URL=http://www.produktinfo.conrad.com/datenblaetter/1000000-1099999/001015155-da-01-en-IC_REG_LDO_ADJ_TPS7A4901DGNR_VSSOP_8_TID.pdf?src-supplier=Conrad, Height=1.6mm, Lead Free="Lead Free", Length=6.5mm, Manufacturer Part Number=LM1117MP-5/NOPB, Max Output Current=800mA, Min Current Limit=800mA, Min Output Voltage=1.2V, Mount="Surface Mount", Number of Outputs=1, Number of Pins=4, Number of Regulators=1, Output Current=800mA, Output Type=Fixed, Output Voltage=3.3V, Packaging="Tape and Reel", Polarity=Positive, Power Dissipation=1.83W, Pricing 1="1=1.14, 10=1.015, 100=0.7912, 500=0.65364 (USD)", Pricing 2="1=2.94, 10=2.642, 100=2.1237, 500=1.74482, 1000=1.44571 (USD)", Radiation Hardening=No, REACH SVHC="No SVHC", Stock 1=34687, Stock 2=111554, Supplier 1=Digi-Key, Supplier 2=Digi-Key, Width=3.56mm
U8: library part CC2D23S, "SENSOR HUMI/TEMP 3.3V I2C 2% SMD", Case/Package=SMD/SMT, Manufacturer=Amphenol, Manufacturer Part Number=CC2A35, Max Operating Temperature=125°C, Max Supply Voltage (DC)=5.5V, Min Operating Temperature=-40°C, Min Supply Voltage (DC)=2.7V, Operating Supply Current=750uA, Operating Supply Voltage=5V, Package Quantity=100, Accuracy=3%, ComponentLink1Description=https://www.alliedelec.com/m/d/304a63eb9a1f3ec115d303d9c5ab2e99.pdf?src-supplier=Allied+Electronics, ComponentLink1URL=https://www.alliedelec.com/m/d/304a63eb9a1f3ec115d303d9c5ab2e99.pdf?src-supplier=Allied+Electronics, ComponentLink2Description=http://www.farnell.com/datasheets/1706532.pdf?src-supplier=Element14, ComponentLink2URL=http://www.farnell.com/datasheets/1706532.pdf?src-supplier=Element14, Height=0.075inch, Interface=I2C, Lead Free="Lead Free", Length=0.236inch, Mount="Surface Mount", Number of Pins=8, Output Type=Analog,Digital, Packaging="Tape and Reel", Pricing 1="1=11.57, 5=10.15, 10=9.135, 25=8.12, 50=7.511, 100=6.496, 250=6.293, 500=6.09, 1000=5.684 (USD)", Resolution=14b, Response Time=7s, Sensing Method=Capacitive, Sensor Type=Temperature, Stock 1=217, Supplier 1=Digi-Key, Termination=SMD/SMT, Width=0.157inch

## Free pads (board coordinates)
  round 5 / inner round 1.35 / far side round 1.35 hole 3.5: 44(3.1,48.26) 44(3.81,3.81) 44(72.81,3.81) 44(72.81,48.26)

## Via types
v1: diameter 0.6, hole 0.4, L1 (Top) to L6 (Bottom), tented both sides, 116 vias
v2: diameter 0.5, hole 0.3, L1 (Top) to L6 (Bottom), tented bottom, 10 vias
v3: diameter 0.6, hole 0.3, L1 (Top) to L6 (Bottom), tented both sides, 1 vias

## Nets (pads, with @x,y where several pads share a name; then routed paths per layer and width w, separated by ;. In a path a pad name is that pad's centre, name@x,y a point inside that pad or via, vN(x,y) a via of type N, cw(c..) or ccw(c..) an arc to the next point about the centre after c; other vN are vias at no path point)
+3.3V_DIGITAL: C1.1 C9.2 C10.1 C19.2 J1.1 R2.2 R11.2 R15.2 R16.2 TP4.1 U2.15 U2.16 U4.1 U8.3 | length 15.3
  L1 (Top) w0.254: v1(2.54,17.272) 3.548,17.272 R16.2 ; R15.2 5.834,17.264 v1(5.842,17.272) ; U8.3 C19.2 7.104,9.009 v1(7.112,9.017) ; TP4.1 v1(21.463,33.401) ; J1.1 22.397,27.223 v1(22.479,27.305) ; R2.2 v1(34.925,25.4) ; U2.15 37.547,30.517 38.047,30.017 ; U2.16 38.047,30.017 ; v1(40.132,29.083) 39.997,28.948 C1.1 38.047,30.017
  other v1: 21.463,36.83 21.463,40.259
+5V_ANALOG: C2.1 C12.2 C13.1 J2.5 R12.2 TP5.1 U2.26 U2.30 U5.1 | length 10.6
  L1 (Top) w0.254: U2.30 35.56,37.531 v1(35.56,38.989) ; U2.26 37.57,37.541 37.57,39.094 37.981,39.505 C2.1 39.489,39.505 v1(39.624,39.37) ; v3(47.752,33.401) TP5.1 ; J2.5 56.019,47.51 v1(56.388,47.879)
  other v1: 51.308,33.401 54.356,33.401
+5V_EE10: C18.+ J3.1 R1.2 TP3.1 U1.1 U1.2 U1.8 U1.9 U7.VOUT U7.VOUT_TAB | length 198.1
  L1 (Top) w0.254: J3.1 7.951,41.86 v1(8.001,41.91) ; R1.2 9.906,7.239 v1(10.795,8.128) 12.043,8.128 U1.9 ; v1(10.541,15.113) 12.028,15.113 U1.2 ; v1(10.541,16.129) 12.044,16.129 U1.1 ; v1(10.795,9.144) U1.8 U1.8 ; TP3.1 C18.+ 57.47,15.875 U7.VOUT_TAB U7.VOUT
  L6 (Bottom) w0.254: v1(8.001,41.91) 8.001,31.496 22.09,17.407 54.491,17.407 v1(54.61,17.526) ; v1(10.541,15.113) 24.003,15.113 ; v1(10.541,16.129) 10.795,15.875 52.705,15.875 53.213,16.383 v1(54.61,16.383) ; v1(10.795,9.144) v1(10.795,8.128) 15.489,8.128 15.681,7.936 21.525,7.936 24.003,10.414 v1(24.003,10.922) 24.003,15.113 ; v1(54.61,15.24) 54.483,15.113 24.003,15.113
+12V: C8.2 C11.1 C17.+ J5.1 TP1.1 U4.5 U4.8 U5.5 U5.8 U7.VIN | length 114.7
  L1 (Top) w0.254: U4.8@24.516,44.935 U4.8 ; U4.5 26.543,44.94 v1(26.543,46.482) ; U5.5 60.538,28.235 v1(60.579,28.194) ; U5.8 59.032,30.348 C11.1@61.214,30.348 ; v1(63.627,30.861) 64.135,31.369 TP1.1 ; U7.VIN 67.07,10.555 C17.+ 72.39,21.59 J5.1
  L6 (Bottom) w0.254: v1(24.13,49.53) 24.13,49.784 v1(25.019,50.673) ; v1(26.543,46.482) 26.543,49.149 v1(25.019,50.673) ; v1(60.579,28.194) 62.738,28.194 v1(64.389,29.845) ; v1(63.627,30.861) 63.627,30.607 v1(64.389,29.845) ; v1(25.019,50.673) 26.416,50.673 27.813,52.07 55.753,52.07 73.787,34.036 73.787,26.289 71.628,24.13 J5.1 64.389,29.591 v1(64.389,29.845)
GND: C1.2 C2.2 C3.2 C4.1 C5.2 C6.2 C7.2 C8.1 C10.2 C11.2 C13.2 C14.1 C15.1 C16.1 C17.- C18.- C19.1 J1.3 J1.5 J1.9 J2.6 J2.10 J3.6 J5.2 R13.1 R14.1 TP6.1 U1.3 U1.4 U1.5 U1.6 U1.7 U1.11 U1.15 U1.16 U1.17 U1.18 U1.19 U1.21 U1.22 U1.62 U1.63 U1.65 U1.66 U1.70 U1.71 U1.72 U1.73 U2.14 U2.17 U2.24 U2.27 U2.28 U2.29 U3.1 U3.9 U4.4 U4.9 U5.4 U5.9 U7.GND U8.2 | length 74.6
  L1 (Top) w0.254: v1(3.556,6.858) C16.1 ; v1(4.699,9.398) 4.699,10.922 U8.2 ; v1(6.096,6.858) C19.1 ; J3.6 6.44,36.232 v1(6.985,35.687) ; U1.7 13.193,10.145 v1(13.208,10.16) ; U1.6 13.177,11.145 v1(13.208,11.176) ; U1.5 13.161,12.145 v1(13.208,12.192) ; U1.4 13.145,13.145 v1(13.208,13.208) ; U1.3 13.129,14.145 v1(13.208,14.224) ; v1(13.843,17.145) U1.11 ; v1(14.605,27.178) 16.084,27.178 J1.9 16.129,25.908 16.637,25.4 18.542,25.4 ; U1.19 16.001,9.145 v1(16.129,9.017) ; U1.18 16.017,10.145 v1(16.129,10.033) ; U1.17 16.033,11.145 v1(16.129,11.049) ; U1.16 16.049,12.145 v1(16.129,12.065) ; U1.15 16.065,13.145 v1(16.129,13.081) ; U1.22 19.035,10.145 v1(19.05,10.16) ; U1.21 18.986,13.145 v1(19.05,13.081) ; J1.5 18.669,25.527 18.542,25.4 ; J1.3 19.812,27.096 19.812,25.654 19.558,25.4 18.542,25.4 ; U1.63 v1(35.56,8.001) ; U1.62 v1(35.56,18.034) ; U2.29 U2.28 U2.27 37.047,40.095 v1(37.592,40.64) 37.727,40.505 C2.2 ; U2.14 37.047,30.005 39.104,27.948 C1.2 40.124,27.948 v1(40.132,27.94) ; U2.17 40.457,32.568 v1(41.148,31.877) ; U2.24 40.64,36.068 v1(41.275,36.703) ; v1(41.529,19.05) 41.529,18.176 U1.65 ; U1.66 v1(42.672,9.144) v1(42.672,9.144) ; C3.2 v1(43.688,35.56) ; v1(43.688,42.926) 44.324,42.926 J2.10 ; v1(44.45,19.05) 44.45,18.255 U1.70 ; U1.72 47.625,5.08 v1(48.641,5.08) ; U1.71 47.625,18.21 v1(47.625,19.05) ; v1(50.546,19.177) 50.546,18.159 U1.73 ; v1(52.324,2.032) 52.451,1.905 C4.1 ; J2.6 54.483,41.91 v1(54.991,42.418) ; v1(54.745,3.81) C7.2 ; v1(55.372,22.225) TP6.1 ; v1(56.515,5.08) 56.65,5.08 C6.2 ; v1(57.15,8.128) C18.- ; U7.GND 62.47,8.142 v1(62.484,8.128) ; U3.1 67.294,1.905 68.445,3.056 C5.2 ; v1(72.39,7.747) C17.-
  other v1: 61.722,2.286 62.865,2.286 64.008,2.286 68.453,3.048 61.722,3.302 64.008,3.302 61.722,4.318 64.008,4.318 61.722,5.334 62.865,5.334 64.008,5.334 49.911,26.797 53.848,26.797 58.039,26.797 56.769,33.528 27.813,35.306 27.813,39.751 21.463,42.799 27.813,43.307
  other v2: 56.388,28.575 57.15,28.575 56.769,29.21 56.388,29.718 57.15,29.718 25.019,42.418 26.035,42.418 25.527,42.799 25.019,43.18 26.035,43.18
NetC3_1: C3.1 U2.23 | length 2
  L1 (Top) w0.254: U2.23 41.529,35.568 C3.1
NetC4_2: C4.2 U1.76 U3.8 | length 18.6
  L1 (Top) w0.254: U1.76 49.991,12.145 49.53,11.684 49.53,6.862 54.475,1.917 C4.2 U3.8
NetC5_1: C5.1 U1.77 U3.3 | length 23.1
  L1 (Top) w0.254: U1.77 51.847,11.145 v1(51.943,11.049) ; U3.3 67.429,4.445 67.437,4.453 v1(67.437,6.477)
  L6 (Bottom) w0.254: v1(51.943,11.049) 51.943,10.16 54.991,7.112 66.802,7.112 v1(67.437,6.477)
NetC6_1: C6.1 U1.74 U3.6 | length 15.4
  L1 (Top) w0.254: U1.74 51.768,14.145 55.753,10.16 55.753,6.989 58.285,4.457 C6.1 U3.6
NetC7_1: C7.1 U1.75 U3.7 | length 16.8
  L1 (Top) w0.254: U1.75 51.753,13.145 54.737,10.161 54.737,4.83 56.38,3.187 C7.1 U3.7
NetC9_1: C9.1 R11.1 R13.2 U4.2 | length 5.3
  L1 (Top) w0.254: U4.2 25.202,38.417 C9.1 25.519,37.092 R13.2 25.654,35.607 R11.1
NetC12_1: C12.1 R12.1 R14.2 U5.2 | length 4.5
  L1 (Top) w0.254: R12.1 51.609,29.13 R14.2 52.824,29.21 C12.1 53.149,29.535 U5.2
NetC14_2: C14.2 U4.6 | length 3
  L1 (Top) w0.254: U4.6 25.852,46.926 C14.2
NetC15_2: C15.2 U5.6 | length 3.3
  L1 (Top) w0.254: U5.6 61.531,28.885 C15.2
NetC16_2: C16.2 U8.1 | length 2
  L1 (Top) w0.254: C16.2 U8.1
NetJ1_2: J1.2 U1.55 | length 22.6
  L1 (Top) w0.254: J1.2 21.209,21.215 26.333,16.091 26.333,12.573 30.988,7.918 30.988,6.073 U1.55
NetJ1_4: J1.4 U1.50 | length 19.7
  L1 (Top) w0.254: J1.4 19.939,21.463 25.879,15.523 25.879,12.385 28.56,9.704 U1.50
NetJ1_10: J1.10 U1.51 | length 24.4
  L1 (Top) w0.254: J1.10 16.692,22.76 16.692,21.988 18.106,20.574 19.939,20.574 20.648,19.865 21.336,19.177 25.273,15.24 25.273,10.033 27.833,7.473 27.833,6.618 28.56,5.891 U1.51
NetJ2_1: J2.1 U2.32 | length 16.8
  L1 (Top) w0.254: U2.32 34.547,40.643 41.414,47.51 J2.1
NetJ2_2: J2.2 U2.6 | length 34.3
  L1 (Top) w0.254: U2.6 30.948,33.568 30.099,34.417 30.099,42.164 38.354,50.419 46.736,50.419 47.244,49.911 47.244,47.606 J2.2
NetJ2_3: J2.3 U2.4 | length 27
  L1 (Top) w0.254: v1(31.75,34.544) 31.774,34.568 U2.4 ; v1(35.56,40.386) 35.56,40.64 39.878,44.958 49.022,44.958 49.34,45.276 J2.3
  L6 (Bottom) w0.254: v1(31.75,34.544) 34.933,37.727 34.933,39.249 35.56,39.876 v1(35.56,40.386)
NetJ2_4: J2.4 U2.2 | length 29.8
  L1 (Top) w0.254: U2.2 34.663,35.568 v1(34.671,35.56) ; v1(50.292,50.292) 51.34,49.244 J2.4
  L6 (Bottom) w0.254: v1(34.671,35.56) 37.084,35.56 41.529,40.005 41.529,45.593 46.228,50.292 v1(50.292,50.292)
NetJ2_7: J2.7 U2.3 | length 24.4
  L1 (Top) w0.254: U2.3 34.276,35.068 34.411,34.933 36.06,34.933 v1(36.068,34.925) ; v1(50.419,44.577) 51.34,43.656 J2.7
  L6 (Bottom) w0.254: v1(36.068,34.925) 37.973,34.925 47.625,44.577 v1(50.419,44.577)
NetJ2_8: J2.8 U2.5 | length 22.1
  L1 (Top) w0.254: U2.5 34.639,34.068 v1(34.671,34.036) ; v1(45.339,36.576) 48.133,36.576 49.34,37.783 J2.8
  L6 (Bottom) w0.254: v1(34.671,34.036) 43.051,34.036 45.339,36.324 v1(45.339,36.576)
NetJ2_9: J2.9 U2.7 | length 20.4
  L1 (Top) w0.254: U2.7 34.623,33.068 v1(34.671,33.02) ; v1(46.482,38.989) 47.34,39.847 J2.9
  L6 (Bottom) w0.254: v1(34.671,33.02) 42.677,33.02 46.482,36.825 v1(46.482,38.989)
NetJ3_2: J3.2 R4.2 U2.11 | length 48.5
  L1 (Top) w0.254: J3.2 4.919,40.86 4.191,40.132 4.191,34.925 14.224,24.892 24.003,24.892 25.527,23.368 v1(26.035,23.368) ; v1(28.194,23.368) 29.202,23.368 R4.2 29.21,24.003 30.099,24.892 31.115,24.892 35.547,29.324 U2.11
  L6 (Bottom) w0.254: v1(26.035,23.368) v1(28.194,23.368)
NetJ3_3: J3.3 R5.2 U2.12 | length 42.4
  L1 (Top) w0.254: J3.3 8.527,39.86 18.85,29.537 21.776,29.537 26.04,25.273 26.543,25.273 v1(26.67,25.146) ; v1(32.131,24.13) 32.25,24.13 R5.2 33.02,24.765 36.047,27.792 U2.12
  L6 (Bottom) w0.254: v1(26.67,25.146) 31.115,25.146 v1(32.131,24.13)
NetJ3_4: J3.4 R3.2 U2.10 | length 39.7
  L1 (Top) w0.254: J3.4 8.511,38.86 18.288,29.083 21.588,29.083 R3.2@27.305,23.366 ; R3.2 R3.2@27.305,23.366 ; U2.10 35.024,31.095 35.024,29.443 31.743,26.162 29.337,26.162 27.305,24.13 R3.2@27.305,23.366
NetJ3_5: J3.5 R7.2 | length 37.4
  L1 (Top) w0.254: J3.5 8.622,37.86 v1(8.763,37.719) ; v1(36.703,25.273) 36.83,25.146 R7.2
  L6 (Bottom) w0.254: v1(8.763,37.719) 20.32,26.162 35.814,26.162 v1(36.703,25.273)
NetR1_1: R1.1 U1.20 | length 6.2
  L1 (Top) w0.254: R1.1 12.638,5.723 U1.20
NetR2_1: R2.1 U1.56 | length 5.2
  L1 (Top) w0.254: U1.56 34.925,20.51 R2.1
NetR3_1: R3.1 U1.49 | length 8.9
  L1 (Top) w0.254: R3.1@27.354,22.311 R3.1 27.305,20.955 26.035,19.685 26.035,17.031 26.502,16.564 27.979,16.564 U1.49
NetR4_1: R4.1 U1.48 | length 4.5
  L1 (Top) w0.254: U1.48 29.21,18.795 R4.1
NetR5_1: R5.1 U1.53 | length 6.8
  L1 (Top) w0.254: U1.53 30.199,17.145 33.02,19.966 R5.1 R5.1@32.854,22.194
NetR6_1: R6.1 U1.52 | length 4.7
  L1 (Top) w0.254: U1.52 31.115,19.2 R6.1
NetR6_2: R6.2 U2.9 | length 9.3
  L1 (Top) w0.254: R6.2 31.115,24.003 v1(34.036,26.924) ; v1(33.909,29.464) 34.547,30.102 U2.9
  L6 (Bottom) w0.254: v1(33.909,29.464) 33.909,27.051 v1(34.036,26.924)
NetR7_1: R7.1 U1.57 | length 7.1
  L1 (Top) w0.254: U1.57 32.699,17.145 36.83,21.276 R7.1
NetR8_1: R8.1 U1.64 | length 20.2
  L1 (Top) w0.254: U1.64 35.708,5.145 42.545,11.982 R8.1
NetR8_2: R8.2 U2.18 | length 11.8
  L1 (Top) w0.254: U2.18 40.846,33.068 42.545,31.369 R8.2
NetR9_1: R9.1 U1.60 | length 17.2
  L1 (Top) w0.254: U1.60 34.06,8.66 38.735,13.335 R9.1
NetR9_2: R9.2 U2.13 | length 8.7
  L1 (Top) w0.254: U2.13 36.547,29.239 38.735,27.051 R9.2
NetR10_1: R10.1 U1.61 | length 20.5
  L1 (Top) w0.254: U1.61 35.265,6.35 36.195,6.35 40.64,10.795 R10.1
NetR10_2: R10.2 U2.8 | length 13.6
  L1 (Top) w0.254: v1(32.766,31.623) 33.097,31.954 U2.8 ; R10.2 v1(40.64,25.4)
  L6 (Bottom) w0.254: v1(32.766,31.623) 38.989,25.4 v1(40.64,25.4)
NetR15_1: R15.1 U1.33 U8.7 | length 24.5
  L1 (Top) w0.254: v1(4.826,12.573) U8.7 R15.1 ; U1.33@20.998,10.145 U1.33 21.075,10.16 v1(22.098,10.16)
  L6 (Bottom) w0.254: v1(4.826,12.573) 8.636,12.573 12.627,8.582 15.677,8.582 15.869,8.39 18.423,8.39 20.193,10.16 v1(22.098,10.16)
NetR16_1: R16.1 U1.36 U8.8 | length 28.2
  L1 (Top) w0.254: v1(1.778,9.017) 1.651,9.144 1.651,12.114 U8.8 R16.1 ; v1(19.558,7.112) 19.591,7.145 U1.36
  L6 (Bottom) w0.254: v1(1.778,9.017) 1.778,8.89 3.167,7.501 10.914,7.501 11.303,7.112 v1(19.558,7.112)
NetU1_25: U1.25 U8.6 | length 19
  L1 (Top) w0.254: U8.6 6.096,15.748 10.033,19.685 19.52,19.685 U1.25
NetU1_26: U1.26 U8.4 | length 19.8
  L1 (Top) w0.254: U8.4@7.366,10.668 U8.4 9.398,13.081 9.398,16.129 12.065,18.796 18.542,18.796 20.193,17.145 U1.26
NetU1_27: U1.27 U8.5 | length 16.8
  L1 (Top) w0.254: U8.5 8.206,14.019 v1(8.382,13.843) ; v1(19.558,16.51) 19.685,16.51 20.05,16.145 U1.27
  L6 (Bottom) w0.254: v1(8.382,13.843) 8.382,14.986 11.303,17.907 18.161,17.907 v1(19.558,16.51)
pads on no net: J1.6 J1.7 J1.8 J3.7 J4.1 J4.2 U1.10 U1.12 U1.13 U1.14 U1.23 U1.24 U1.28 U1.29 U1.30 U1.31 U1.32 U1.34 U1.35 U1.37 U1.38 U1.39 U1.40 U1.41 U1.42 U1.43 U1.44 U1.45 U1.46 U1.47 U1.54 U1.58 U1.59 U1.67 U1.68 U1.69 U1.78 U1.79 U1.80 U2.1 U2.19 U2.20 U2.21 U2.22 U2.25 U2.31 U3.2 U3.4 U3.5 U4.3 U4.7 U5.3 U5.7

## Polygon pours and split planes (outlines as drawn)
+5V_EE10 on L1 (Top) "L1 (Top)-+5V_EE10 1" (solid, pour order 28): 58.928,13.97 53.467,13.97 53.467,18.669 58.928,18.669
+12V on L1 (Top) "L1 (Top)-+12V 1" (solid, pour order 24): 58.039,31.623 58.039,29.972 60.071,29.972 60.071,29.21 65.151,29.21 65.151,31.623
GND on L1 (Top) "L1 (Top)-GND 1" (solid, pour order 18): 55.88,28.448 46.609,28.448 46.609,26.035 62.738,26.035 62.738,27.686 61.468,27.686 57.658,27.686 57.658,32.131 62.865,32.131 62.865,34.417 55.88,34.417
+5V_ANALOG on L1 (Top) "L1 (Top)-+5V_EE10" (solid, pour order 16): 55.626,29.972 46.736,29.972 46.736,34.417 55.626,34.417
+12V on L1 (Top) "L1 (Top)-+12V" (solid, pour order 14): 23.495,44.069 24.765,44.069 24.765,46.355 25.654,46.355 25.654,51.435 23.495,51.435
GND on L1 (Top) "L1 (Top)-GND" (solid, pour order 12): 26.289,32.385 26.289,41.91 20.701,41.91 20.701,48.895 22.86,48.895 22.86,43.688 27.051,43.688 27.051,48.768 28.956,48.768 28.956,32.385
+3.3V_DIGITAL on L1 (Top) "L1 (Top)-+3.3V_DIGITAL" (solid, pour order 10): 24.892,41.783 24.892,32.385 20.701,32.385 20.701,41.783
GND on L2 (GND) "L2 (GND)-GND" (solid, pour order 0): 0,0 76.2,0 76.2,52.705 0,52.705
+3.3V_DIGITAL on L3 (3.3V) "L3 (3.3V)-+3.3V_DIGITAL" (solid, pour order 2): 0,0 76.2,0 76.2,52.705 0,52.705
+5V_ANALOG on L4 (5V Analog) "L4 (5V Analog)-+5V_ANALOG" (solid, pour order 4): 0,0 76.2,0 76.2,52.705 0,52.705
GND on L5 (GND) "L5 (GND)-GND" (solid, pour order 8): 0,0 76.2,0 76.2,52.705 0,52.705

## Silkscreen, mask and mechanical layers (free items; w line width, h text height)
Mechanical 1:
  lines w0.1: -0.15,0 ccw(c0,0) 0,-0.15 11.049,-0.15 ccw(c11.049,-0.05) 11.149,-0.05 11.149,3.837 51.462,3.837 51.462,-0.05 ccw(c51.562,-0.05) 51.562,-0.15 76.2,-0.15 ccw(c76.2,0) 76.35,0 76.35,52.705 ccw(c76.2,52.705) 76.2,52.855 0,52.855 ccw(c0,52.705) -0.15,52.705 -0.15,0

## Text inside footprints (layer, text, board x,y; h text height)
J1: Mechanical 17 "1" at 21.294,27.548 h0.69 r180; Top Overlay "1" at 21.294,27.548 h0.69 r180
J2: Top Overlay "AFE IDC cable" at 42.589,41.934 h1 r90; Top Overlay "Pt+" at 45.764,50.189 h0.8 r90; Top Overlay "OP2" at 47.796,50.189 h0.8 r90; Top Overlay "OP4" at 49.701,50.189 h0.8 r90; Top Overlay "OP6" at 51.733,50.189 h0.8 r90; Top Overlay "VIN" at 53.765,50.189 h0.8 r90; Top Overlay "Pt-" at 45.637,37.225 h0.8 r90; Top Overlay "OP1" at 47.669,37.362 h0.8 r90; Top Overlay "OP3" at 49.701,37.108 h0.8 r90; Top Overlay "OP5" at 51.733,37.108 h0.8 r90; Top Overlay "GND" at 53.638,37.108 h0.8 r90
J4: Top Overlay "-" at 10.846,24.765 h1.52 r270; Top Overlay "+" at 10.846,29.845 h1.52 r270
J5: Top Overlay "-" at 65.405,28.575 h1.52 r90; Top Overlay "+" at 65.405,23.495 h1.52 r90
U1: Mechanical 19 "No PCB in this area" at 15.81,0.745 h4